# Allegro board fmc_tlu_v1_19.brd
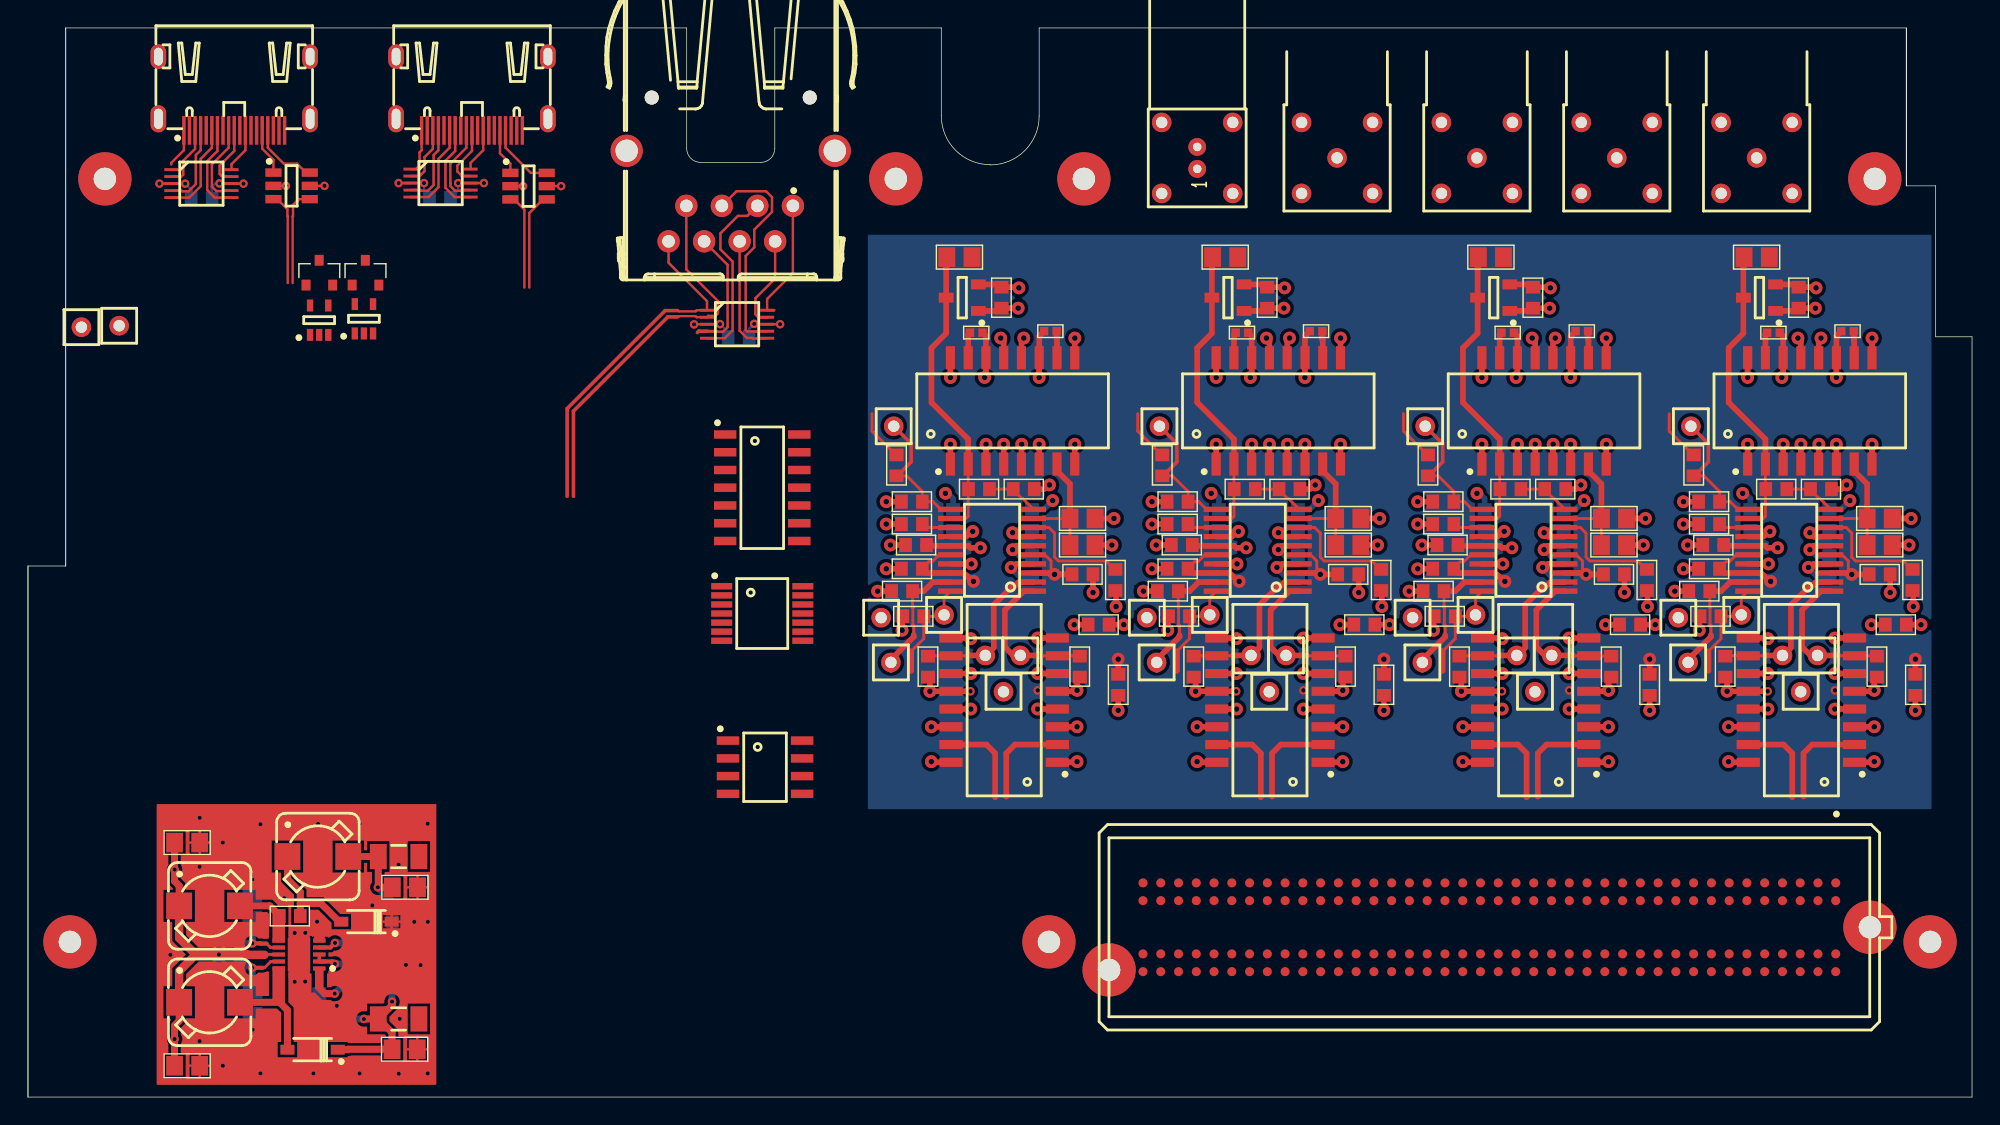
[diagram p0: board, top side]
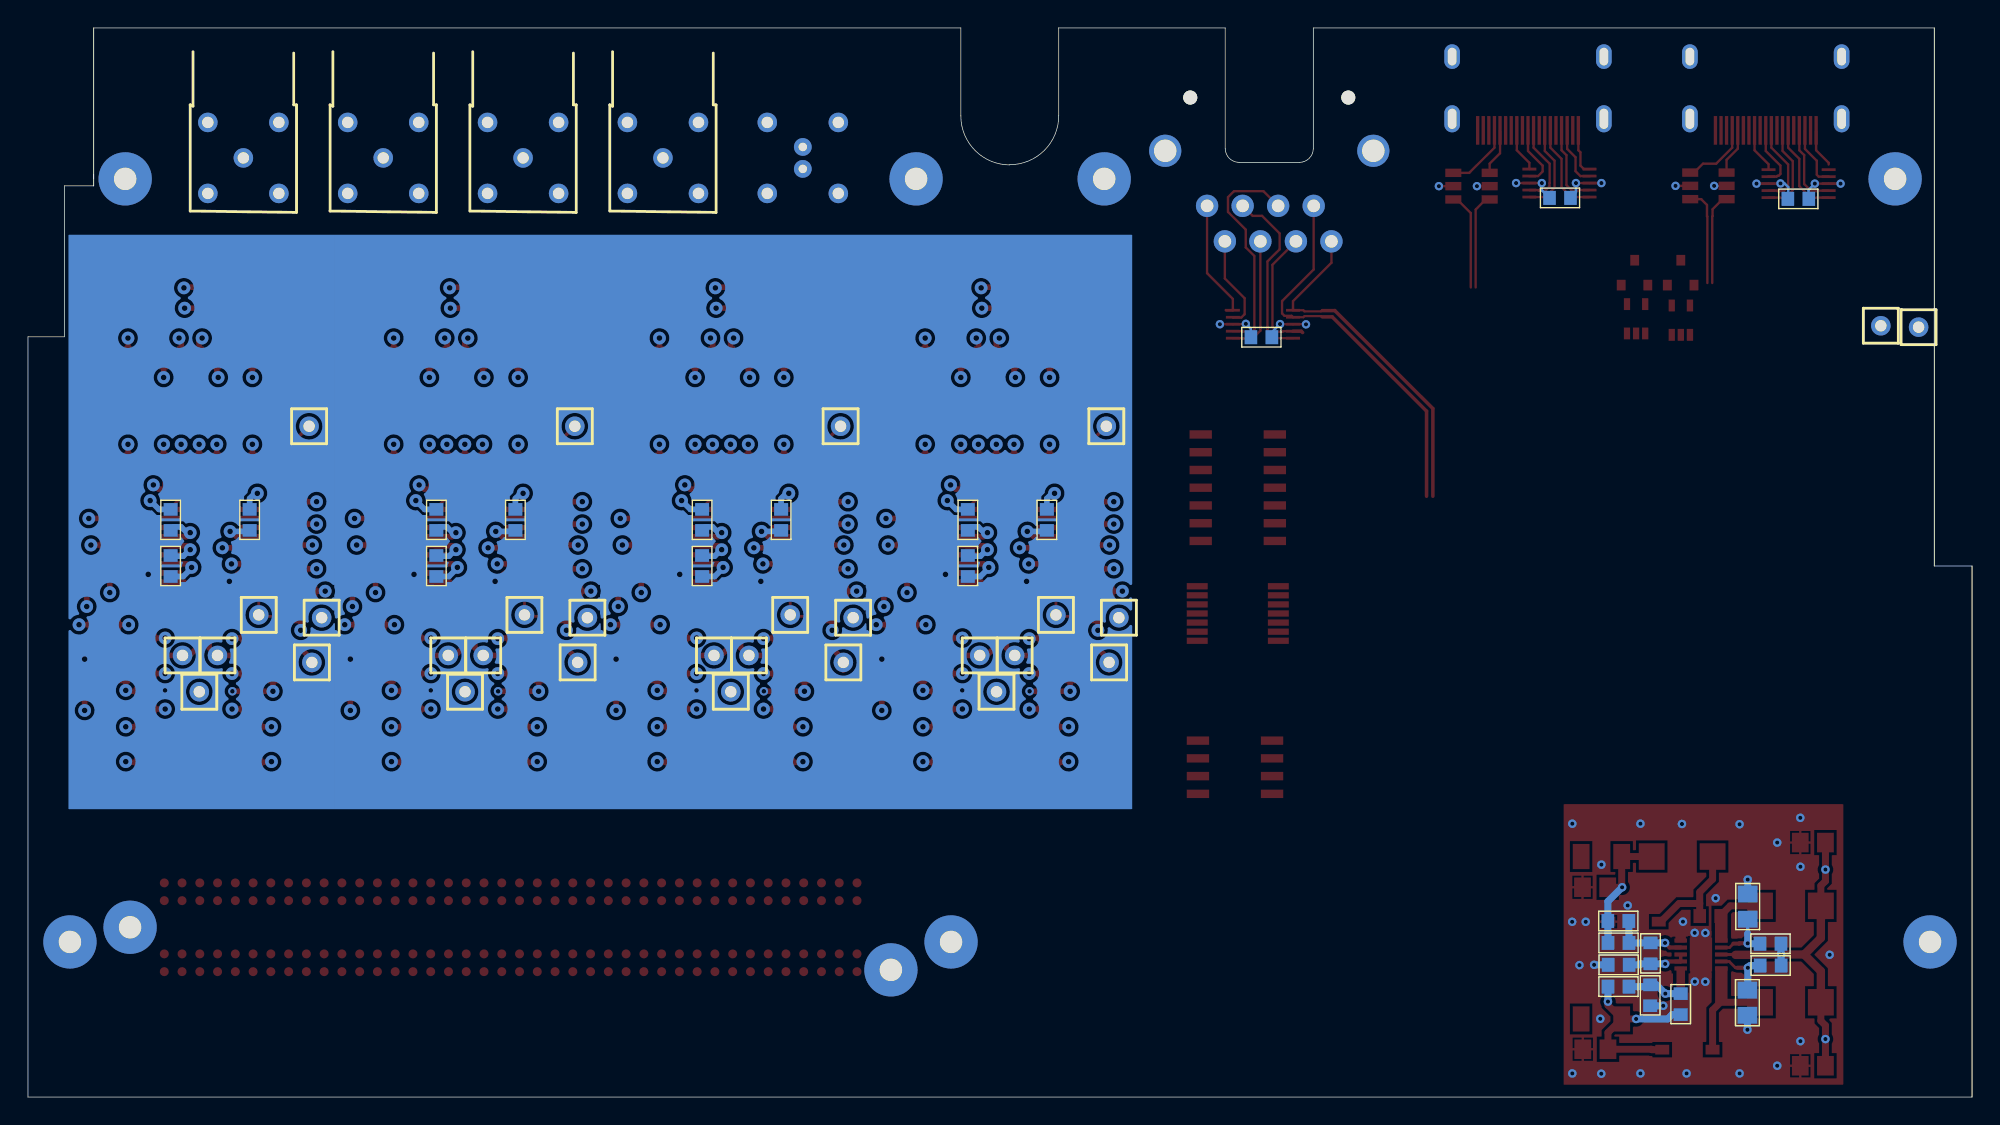
[diagram p1: board, bottom side, seen from below]

Outline 139 x 76.5 mm; copper layers: TOP, L2, L3, L4, L5, BOTTOM. Coordinates in mm from the lower left corner of the outline.
Outline path: 0,38 0,0 ; 0,38 2.7,38 ; 0,38 0,0 ; 0,0 139,0 139,54.4 136.4,54.4 136.4,65.2 134.3,65.2 ; 2.7,38 2.7,76.5 ; 2.7,38 2.7,76.5 ; 2.7,76.5 47.1,76.5 47.1,67.88 arc(47.39,67.17) 48.1,66.88 52.4,66.88 arc(53.1,67.17) 53.4,67.88 53.4,76.5 65.3,76.5 65.3,70.21 arc(66.33,67.74) 68.81,66.72 ; 134.3,76.5 72.3,76.5 72.3,70.2 arc(71.27,67.73) 68.8,66.7 ; 134.3,76.5 134.3,65.7 ; 134.3,76.5 134.3,65.2 ; 134.3,65.2 134.3,66

## Design rules (mm)
constraint set DEFAULT: min track width 0.17, pair gap 0.18
net group BEAM_TRIGGER: nets BEAM_TRIGGER<0> BEAM_TRIGGER<1> BEAM_TRIGGER<2> BEAM_TRIGGER<3>
net group BEAM_TRIGGER*: nets BEAM_TRIGGER*<0> BEAM_TRIGGER*<1> BEAM_TRIGGER*<2> BEAM_TRIGGER*<3>
net group BEAM_TRIGGER_CFD: nets BEAM_TRIGGER_CFD<0> BEAM_TRIGGER_CFD<1> BEAM_TRIGGER_CFD<2> BEAM_TRIGGER_CFD<3>
net group BEAM_TRIGGER_CFD*: nets BEAM_TRIGGER_CFD*<0> BEAM_TRIGGER_CFD*<1> BEAM_TRIGGER_CFD*<2> BEAM_TRIGGER_CFD*<3>
net group FMC_LA: nets FMC_LA<0> FMC_LA<1> FMC_LA<2> FMC_LA<3> FMC_LA<4> FMC_LA<5> FMC_LA<6> FMC_LA<7> FMC_LA<8> FMC_LA<9> FMC_LA<10> FMC_LA<11> FMC_LA<12> FMC_LA<13> FMC_LA<14> FMC_LA<15> FMC_LA<16> FMC_LA<17> FMC_LA<18> FMC_LA<19> FMC_LA<20> FMC_LA<21> FMC_LA<22> FMC_LA<23> FMC_LA<24> FMC_LA<25> FMC_LA<26> FMC_LA<27> FMC_LA<28> FMC_LA<29> FMC_LA<30> FMC_LA<31> FMC_LA<32> FMC_LA<33>
net group FMC_LA*: nets FMC_LA*<0> FMC_LA*<1> FMC_LA*<2> FMC_LA*<3> FMC_LA*<4> FMC_LA*<5> FMC_LA*<6> FMC_LA*<7> FMC_LA*<8> FMC_LA*<9> FMC_LA*<10> FMC_LA*<11> FMC_LA*<12> FMC_LA*<13> FMC_LA*<14> FMC_LA*<15> FMC_LA*<16> FMC_LA*<17> FMC_LA*<18> FMC_LA*<19> FMC_LA*<20> FMC_LA*<21> FMC_LA*<22> FMC_LA*<23> FMC_LA*<24> FMC_LA*<25> FMC_LA*<26> FMC_LA*<27> FMC_LA*<28> FMC_LA*<29> FMC_LA*<30> FMC_LA*<31> FMC_LA*<32> FMC_LA*<33>
net group IN: nets IN<0> IN<1> IN<2> IN<3>
net group VTHRESH: nets VTHRESH<0> VTHRESH<1> VTHRESH<2> VTHRESH<3>

## Placement (name value [footprint] x y rotation side)
C1_1  100nF  [C0603]  69.6 57.2 90 top
C1_2  100nF  [C0603]  88.6 57.2 90 top
C1_3  100nF  [C0603]  107.6 57.2 90 top
C1_4  100nF  [C0603]  126.6 57.2 90 top
C1_5  4.7uF  [C0805]  11.38 18.21 180 top
C2_1  10nF  [C0603]  63.2 42.6 0 top
C2_2  10nF  [C0603]  82.2 42.6 0 top
C2_3  10nF  [C0603]  101.2 42.6 0 top
C2_4  10nF  [C0603]  120.2 42.6 0 top
C2_5  330nF  [C0805]  16.06 6.75 90 bottom
C3_1  1.0uF  [C0603]  77.95 29.5 90 top
C3_2  1.0uF  [C0603]  96.95 29.5 90 top
C3_3  1.0uF  [C0603]  115.95 29.5 90 top
C3_4  1.0uF  [C0603]  134.95 29.5 90 top
C3_5  330nF  [C0805]  16.04 13.63 270 bottom
C4_1  1.0uF  [C0603]  76.55 33.8 0 top
C4_2  1.0uF  [C0603]  95.55 33.8 0 top
C4_3  1.0uF  [C0603]  114.55 33.8 0 top
C4_4  1.0uF  [C0603]  133.55 33.8 0 top
C4_5  100nF  [C0603]  25.27 9.46 180 bottom
C5_1  100nF  [C0603]  75.4 37.4 180 top
C5_2  100nF  [C0603]  94.4 37.4 180 top
C5_3  100nF  [C0603]  113.4 37.4 180 top
C5_4  100nF  [C0603]  132.4 37.4 180 top
C5_5  1uF  [C0603]  18.72 12.95 0 top
C6_1  1.0uF  [C0603]  63.5 39.5 0 top
C6_2  1.0uF  [C0603]  82.5 39.5 0 top
C6_3  1.0uF  [C0603]  101.5 39.5 0 top
C6_4  1.0uF  [C0603]  120.5 39.5 0 top
C6_5  33pF  [C0603]  20.83 6.65 90 bottom
C7_1  100nF  [C0603]  71.8 41.3 270 bottom
C7_2  100nF  [C0603]  90.8 41.3 270 bottom
C7_3  100nF  [C0603]  109.8 41.3 270 bottom
C7_4  100nF  [C0603]  128.8 41.3 270 bottom
C7_5  10uF  [C0805]  26.95 15.01 180 top
C8_1  100nF  [C0603]  63.2 37.8 0 top
C8_2  100nF  [C0603]  82.2 37.8 0 top
C8_3  100nF  [C0603]  101.2 37.8 0 top
C8_4  100nF  [C0603]  120.2 37.8 0 top
C8_5  4.7uF  [C0805]  26.93 3.42 180 top
C9_1  100nF  [C0603]  71.8 38 90 bottom
C9_2  100nF  [C0603]  90.8 38 90 bottom
C9_3  100nF  [C0603]  109.8 38 90 bottom
C9_4  100nF  [C0603]  128.8 38 90 bottom
C9_5  68pF  [C0603]  25.29 12.6 180 bottom
C10_1  100nF  [C0603]  66.15 41.3 270 bottom
C10_2  100nF  [C0603]  85.15 41.3 270 bottom
C10_3  100nF  [C0603]  104.15 41.3 270 bottom
C10_4  100nF  [C0603]  123.15 41.3 270 bottom
C14  100nF  [C0603]  12.42 64.27 0 bottom
C14_5  4.7uF  [C0805]  11.38 2.24 180 top
C15  100nF  [C0603]  50.81 54.37 0 bottom
C16  100nF  [C0603]  29.46 64.34 0 bottom
D1_1  -  [SOT95P240X130-3N]  66.8 57.2 180 top
D1_2  -  [SOT95P240X130-3N]  85.8 57.2 180 top
D1_3  -  [SOT95P240X130-3N]  104.8 57.2 180 top
D1_4  -  [SOT95P240X130-3N]  123.8 57.2 180 top
D1_5  -  [SOD3715X145N]  20.35 3.39 180 top
D2_5  -  [SOD3715X145N]  24.2 12.55 180 top
IC1  -  [SOP65P640X120-14N]  52.5 34.6 0 top
IC1_1  -  [SOIC127P835X237-16N]  70.4 49.1 90 top
IC1_2  -  [SOIC127P835X237-16N]  89.4 49.1 90 top
IC1_3  -  [SOIC127P835X237-16N]  108.4 49.1 90 top
IC1_4  -  [SOIC127P835X237-16N]  127.4 49.1 90 top
IC1_5  -  [SON50P300X300X100-11N-R240X160]  19.38 10.2 180 top
IC2  -  [SOIC127P600X175-14N]  52.5 43.6 0 top
IC2_1  -  [TSSOP20MA_065]  71.9 36.2 90 top
IC2_2  -  [TSSOP20MA_065]  90.9 36.2 90 top
IC2_3  -  [TSSOP20MA_065]  109.9 36.2 90 top
IC2_4  -  [TSSOP20MA_065]  128.9 36.2 90 top
IC3  -  [SOT95P280X145-6N]  18.85 65.2 0 top
IC3_1  -  [SOIC127P835X237-16N]  69.8 28.4 180 top
IC3_2  -  [SOIC127P835X237-16N]  88.8 28.4 180 top
IC3_3  -  [SOIC127P835X237-16N]  107.8 28.4 180 top
IC3_4  -  [SOIC127P835X237-16N]  126.8 28.4 180 top
IC4  -  [SOT65P210X110-5N]  20.82 55.59 90 top
IC5  -  [SOT95P280X145-6N]  35.79 65.18 0 top
IC6  -  [SOT65P210X110-5N]  24.02 55.69 90 top
IC7  -  [SOIC127P600X175-8N]  52.7 23.6 0 top
J1  -  [SAMTEC_MHDMI-19]  14.75 69.17 0 top
J2  -  [SAMTEC_MHDMI-19]  31.75 69.17 0 top
J3  -  [MOLEX_44661-1011]  50.25 68.86 270 top
J4  -  [SAMTEC_ASP-134606-01]  104.49 12.15 0 top
L1_5  10uH  [IND_WURTH_XS]  12.99 6.78 0 top
L2_5  10uH  [IND_WURTH_XS]  12.99 13.68 0 top
L3_5  10uH  [IND_WURTH_XS]  20.73 17.21 0 top
L4_5  -  [INDC3216X130N]  26.5 5.59 0 top
L5_5  -  [INDC3216X130N]  26.5 17.21 0 top
NOREF  -  [unnamed]  3 11.1 0 top
NOREF#2  -  [unnamed]  62.05 65.7 0 top
NOREF#3  -  [unnamed]  5.5 65.7 0 top
NOREF#4  -  [unnamed]  131.7 12.15 0 top
NOREF#5  -  [unnamed]  136 11.1 0 top
NOREF#6  -  [unnamed]  75.5 65.7 0 top
NOREF#7  -  [unnamed]  132.05 65.7 0 top
NOREF#8  -  [unnamed]  73 11.1 0 top
NOREF#9  -  [unnamed]  77.3 9.1 0 top
PX1  -  [LEMOEPG00_302]  83.6 66.56 90 top
PX2  -  [PLEMO80]  93.6 67.2 90 top
PX3  -  [PLEMO80]  103.6 67.2 90 top
PX4  -  [PLEMO80]  113.6 67.2 90 top
PX5  -  [PLEMO80]  123.6 67.2 90 top
R1_1  51  [C0402]  67.8 54.7 180 top
R1_2  51  [C0402]  86.8 54.7 180 top
R1_3  51  [C0402]  105.8 54.7 180 top
R1_4  51  [C0402]  124.8 54.7 180 top
R1_5  4.7k  [C0603]  14.41 10.97 0 bottom
R2_1  12  [C0805]  66.6 60.1 180 top
R2_2  12  [C0805]  85.6 60.1 180 top
R2_3  12  [C0805]  104.6 60.1 180 top
R2_4  12  [C0805]  123.6 60.1 180 top
R2_5  4.7k  [C0603]  14.4 9.41 0 bottom
R3_1  51  [C0603]  68 43.5 0 top
R3_2  51  [C0603]  87 43.5 0 top
R3_3  51  [C0603]  106 43.5 0 top
R3_4  51  [C0603]  125 43.5 0 top
R3_5  20k  [C0603]  22.99 10.28 270 bottom
R4_1  51  [C0402]  73.1 54.8 0 top
R4_2  51  [C0402]  92.1 54.8 0 top
R4_3  51  [C0402]  111.1 54.8 0 top
R4_4  51  [C0402]  130.1 54.8 0 top
R4_5  110k  [C0603]  25.28 11.03 180 bottom
R5_1  100  [C0603]  62.1 45.2 270 top
R5_2  100  [C0603]  81.1 45.2 270 top
R5_3  100  [C0603]  100.1 45.2 270 top
R5_4  100  [C0603]  119.1 45.2 270 top
R5_5  90k9  [C0603]  25.28 7.9 180 bottom
R6_1  100  [C0805]  75.4 41.4 180 top
R6_2  100  [C0805]  94.4 41.4 180 top
R6_3  100  [C0805]  113.4 41.4 180 top
R6_4  100  [C0805]  132.4 41.4 180 top
R6_5  20k  [C0603]  23.01 7.28 90 bottom
R7_1  100  [C0603]  71.2 43.5 180 top
R7_2  100  [C0603]  90.2 43.5 180 top
R7_3  100  [C0603]  109.2 43.5 180 top
R7_4  100  [C0603]  128.2 43.5 180 top
R8_1  100  [C0805]  75.4 39.5 180 top
R8_2  100  [C0805]  94.4 39.5 180 top
R8_3  100  [C0805]  113.4 39.5 180 top
R8_4  100  [C0805]  132.4 39.5 180 top
R9_1  33k  [C0603]  63.2 41 0 top
R9_2  33k  [C0603]  82.2 41 0 top
R9_3  33k  [C0603]  101.2 41 0 top
R9_4  33k  [C0603]  120.2 41 0 top
R10_1  XX  [C0603]  77.75 37 90 top
R10_2  XX  [C0603]  96.75 37 90 top
R10_3  XX  [C0603]  115.75 37 90 top
R10_4  XX  [C0603]  134.75 37 90 top
R11_1  75  [C0603]  62.5 36.2 0 top
R11_2  75  [C0603]  81.5 36.2 0 top
R11_3  75  [C0603]  100.5 36.2 0 top
R11_4  75  [C0603]  119.5 36.2 0 top
R12_1  75  [C0603]  64.35 30.8 90 top
R12_2  75  [C0603]  83.35 30.8 90 top
R12_3  75  [C0603]  102.35 30.8 90 top
R12_4  75  [C0603]  121.35 30.8 90 top
R13_1  75  [C0603]  63.3 34.4 0 top
R13_2  75  [C0603]  82.3 34.4 0 top
R13_3  75  [C0603]  101.3 34.4 0 top
R13_4  75  [C0603]  120.3 34.4 0 top
R14_1  75  [C0603]  75.2 30.8 90 top
R14_2  75  [C0603]  94.2 30.8 90 top
R14_3  75  [C0603]  113.2 30.8 90 top
R14_4  75  [C0603]  132.2 30.8 90 top
T1  -  [SOT23]  20.82 58.99 90 top
T2  -  [SOT23]  24.12 58.99 90 top
TP1_1  -  [TP_HOLE_08]  61.9 48 0 top
TP1_2  -  [TP_HOLE_08]  80.9 48 0 top
TP1_3  -  [TP_HOLE_08]  99.9 48 0 top
TP1_4  -  [TP_HOLE_08]  118.9 48 0 top
TP2_1  -  [TP_HOLE_08]  65.5 34.5 0 top
TP2_2  -  [TP_HOLE_08]  84.5 34.5 0 top
TP2_3  -  [TP_HOLE_08]  103.5 34.5 0 top
TP2_4  -  [TP_HOLE_08]  122.5 34.5 0 top
TP3_1  -  [TP_HOLE_08]  61.7 31.1 0 top
TP3_2  -  [TP_HOLE_08]  80.7 31.1 0 top
TP3_3  -  [TP_HOLE_08]  99.7 31.1 0 top
TP3_4  -  [TP_HOLE_08]  118.7 31.1 0 top
TP4_1  -  [TP_HOLE_08]  61 34.3 0 top
TP4_2  -  [TP_HOLE_08]  80 34.3 0 top
TP4_3  -  [TP_HOLE_08]  99 34.3 0 top
TP4_4  -  [TP_HOLE_08]  118 34.3 0 top
TP5_1  -  [TP_HOLE_08]  70.95 31.6 0 top
TP5_2  -  [TP_HOLE_08]  89.95 31.6 0 top
TP5_3  -  [TP_HOLE_08]  108.95 31.6 0 top
TP5_4  -  [TP_HOLE_08]  127.95 31.6 0 top
TP6_1  -  [TP_HOLE_08]  68.45 31.6 0 top
TP6_2  -  [TP_HOLE_08]  87.45 31.6 0 top
TP6_3  -  [TP_HOLE_08]  106.45 31.6 0 top
TP6_4  -  [TP_HOLE_08]  125.45 31.6 0 top
TP7_1  -  [TP_HOLE_08]  69.75 29 0 top
TP7_2  -  [TP_HOLE_08]  88.75 29 0 top
TP7_3  -  [TP_HOLE_08]  107.75 29 0 top
TP7_4  -  [TP_HOLE_08]  126.75 29 0 top
TP11  -  [TP_HOLE_08]  6.52 55.19 0 top
TP12  -  [TP_HOLE_08]  3.82 55.09 0 top
U1  -  [SOT552-1]  12.4 65.36 0 top
U2  -  [SOT552-1]  50.7 55.3 0 top
U3  -  [SOT552-1]  29.5 65.4 0 top

## Library data of the parts
C1_1-C1_4 C4_5 C5_1-C5_4 C7_1-C7_4 C8_1-C8_4 C9_1-C9_4 C10_1-C10_4 C14-C16 = CAPCERSMDCL2: part number: CAPCERSMDCL2_0603-100NF,16V; tolerance: 10%
C1_5 C8_5 C14_5 = CAPCERSMDCL2: part number: CAPCERSMDCL2_0805-4.7UF,10V; tolerance: +80%-20%
C2_1-C2_4 = CAPCERSMDCL2: part number: CAPCERSMDCL2_0603-10NF,50V; tolerance: 10%
C2_5 C3_5 = CAPCERSMDCL2: part number: CAPCERSMDCL2_0805-330NF,50V; tolerance: 10%
C3_1-C3_4 C4_1-C4_4 C6_1-C6_4 = CAPCERSMDCL2: part number: CAPCERSMDCL2_0603-1.0UF,6.3V; tolerance: 10%
C5_5 = CAPCERSMDCL2: part number: CAPCERSMDCL2_0603-1UF,16V; tolerance: 10%
C6_5 = CAPCERSMDCL1: part number: CAPCERSMDCL1_0603-33PF,50V; tolerance: 5%
C7_5 = CAPCERSMDCL2: part number: CAPCERSMDCL2_0805-10UF,10V_GEN; tolerance: 10%
C9_5 = CAPCERSMDCL1: part number: CAPCERSMDCL1_0603-68PF,50V; tolerance: 5%
D1_1-D1_4 = DIODE_DUAL_SERIES: part number: HBAT-540C
D1_5 D2_5 = DIODE: part number: DIODE_SCHOTTKY_CA-SD101AW
IC1 = AD5665R: part number: AD5665RBRUZ-1
IC1_1-IC1_4 = DELAY_LINE_GL2L: part number: GL2L5LS050D-C
IC1_5 = LT3471: part number: LT3471EDD#PBF
IC2 = OPA4277: part number: OPA4277UA
IC2_1-IC2_4 = MAX9601
IC3 IC5 = USBLC6-2: part number: USBLC6-2SC6
IC3_1-IC3_4 = DELAY_LINE_GL2L: part number: GL2L5LS100D-C
IC4 IC6 = 74LVC1G07: part number: SN74LVC1G07DCK
IC7 = 24AA025E48
J1 J2 = CON19P: part number: MHDMI-19-02-H-TH-L-TR
J3 = CON8P: part number: CON8P-MOLEX_44661-1011
J4 = CON160P_40CDGH: part number: ASP-134606-01
L1_5 L2_5 L3_5 = INDUCTANCE: part number: INDUCTANCE_XS-10UH_25%
L4_5 L5_5 = FERRITE: part number: FERRITE_SMD-7427921,WURTH
PX1 = PLEMO2CI: part number: PLEMO2CI-PLEMO2-00B
PX2-PX5 = PCOAX: part number: PCOAX-PLEMO00C
R1_1-R1_4 R4_1-R4_4 = RSMD0402: part number: RSMD0402_1/16W-51,1%; tolerance: 1%
R1_5 R2_5 = RSMD0603: part number: RSMD0603_1/16W-4K7,5%; tolerance: 5%
R2_1-R2_4 = RSMD0805: part number: RSMD0805_125MW-12,1%; tolerance: 1%
R3_1-R3_4 = RSMD0603: part number: RSMD0603_1/10W-51,1%; tolerance: 1%
R3_5 R6_5 = RSMD0603: part number: RSMD0603_1/16W-20K,1%; tolerance: 1%
R4_5 = RSMD0603: part number: RSMD0603_100MW-110K,0.1%; tolerance: 0.1%
R5_1-R5_4 R7_1-R7_4 = RSMD0603: part number: RSMD0603_1/10W-100,1%; tolerance: 1%
R5_5 = RSMD0603: part number: RSMD0603_1/16W-90K9,1%; tolerance: 1%
R6_1-R6_4 R8_1-R8_4 = RSMD0805: part number: RSMD0805_125MW-100,1%; tolerance: 1%
R9_1-R9_4 = RSMD0603: part number: RSMD0603_1/10W-33K,1%; tolerance: 1%
R10_1-R10_4 = RSMD0603: part number: RSMD0603_1/10W-XX,1%; tolerance: 1%
R11_1-R11_4 R12_1-R12_4 R13_1-R13_4 R14_1-R14_4 = RSMD0603: part number: RSMD0603_1/10W-75,1%; tolerance: 1%
T1 T2 = TRANS MOSFET: part number: TRANS MOSFET_GSD-FDV301N,SOT23
TP1_1-TP1_4 TP2_1-TP2_4 TP3_1-TP3_4 TP4_1-TP4_4 TP5_1-TP5_4 TP6_1-TP6_4 TP7_1-TP7_4 TP11 TP12 = TP: part number: TP_HOLE-0.8MM
U1-U3 = PRTR5V0U8S: part number: PRTR5V0U8S_TSSOP-NXP

## Footprints (pads in the part's own frame, mm; a bottom-side part is the same pattern mirrored in y, then rotated)
C0402
  rect 0.6x0.6 smd: 1(-0.45,0) 2(0.45,0)
C0603
  rect 0.9x1 smd: 1(-0.75,0) 2(0.75,0)
C0805
  rect 1.2x1.4 smd: 1(-0.9,0) 2(0.9,0)
IND_WURTH_XS
  rect 1.85x1.9 smd: 1(-2.18,0) 2(2.17,0)
INDC3216X130N
  rect 1.2x1.8 smd: 1(-1.45,0) 2(1.45,0)
LEMOEPG00_302
  round 1.27 hole 0.6: 1(-0.15,0) 2(1.42,0)
  round 1.397 hole 0.813: 3(-1.905,-2.54) 4(3.175,-2.54) 5(3.175,2.54) 6(-1.905,2.54)
MOLEX_44661-1011
  round 1 hole 3.25 unplated: (-2.66,5.65) (-2.66,-5.65)
  round 1.6 hole 0.9: 1(5.09,4.445) 2(7.63,3.175) 3(5.09,1.905) 4(7.63,0.635) 5(5.09,-0.635) 6(7.63,-1.905) 7(5.09,-3.175) 8(7.63,-4.445)
  round 2.301 hole 1.6: 9(1.15,7.44) 10(1.15,-7.44)
PLEMO80
  round 1.397 hole 0.813: 1(0,0) 2(2.54,-2.54) 3(2.54,2.54) 4(-2.54,2.54) 5(-2.54,-2.54)
SAMTEC_ASP-134606-01
  round 1.001 hole 1.3 unplated: (-27.19,-3.05) (27.19,0)
  round 0.64 smd: C1(24.765,3.175) C2(23.495,3.175) C3(22.225,3.175) C4(20.955,3.175) C5(19.685,3.175) C6(18.415,3.175) C7(17.145,3.175) C8(15.875,3.175) C9(14.605,3.175) C10(13.335,3.175) C11(12.065,3.175) C12(10.795,3.175) C13(9.525,3.175) C14(8.255,3.175) C15(6.985,3.175) C16(5.715,3.175) C17(4.445,3.175) C18(3.175,3.175) C19(1.905,3.175) C20(0.635,3.175) C21(-0.635,3.175) C22(-1.905,3.175) C23(-3.175,3.175) C24(-4.445,3.175) C25(-5.715,3.175) C26(-6.985,3.175) C27(-8.255,3.175) C28(-9.525,3.175) C29(-10.795,3.175) C30(-12.065,3.175) C31(-13.335,3.175) C32(-14.605,3.175) C33(-15.875,3.175) C34(-17.145,3.175) C35(-18.415,3.175) C36(-19.685,3.175) C37(-20.955,3.175) C38(-22.225,3.175) C39(-23.495,3.175) C40(-24.765,3.175) D1(24.765,1.905) D2(23.495,1.905) D3(22.225,1.905) D4(20.955,1.905) D5(19.685,1.905) D6(18.415,1.905) D7(17.145,1.905) D8(15.875,1.905) D9(14.605,1.905) D10(13.335,1.905) D11(12.065,1.905) D12(10.795,1.905) D13(9.525,1.905) D14(8.255,1.905) D15(6.985,1.905) D16(5.715,1.905) D17(4.445,1.905) D18(3.175,1.905) D19(1.905,1.905) D20(0.635,1.905) D21(-0.635,1.905) D22(-1.905,1.905) D23(-3.175,1.905) D24(-4.445,1.905) D25(-5.715,1.905) D26(-6.985,1.905) D27(-8.255,1.905) D28(-9.525,1.905) D29(-10.795,1.905) D30(-12.065,1.905) D31(-13.335,1.905) D32(-14.605,1.905) D33(-15.875,1.905) D34(-17.145,1.905) D35(-18.415,1.905) D36(-19.685,1.905) D37(-20.955,1.905) D38(-22.225,1.905) D39(-23.495,1.905) D40(-24.765,1.905) G1(24.765,-1.905) G2(23.495,-1.905) G3(22.225,-1.905) G4(20.955,-1.905) G5(19.685,-1.905) G6(18.415,-1.905) G7(17.145,-1.905) G8(15.875,-1.905) G9(14.605,-1.905) G10(13.335,-1.905) G11(12.065,-1.905) G12(10.795,-1.905) G13(9.525,-1.905) G14(8.255,-1.905) G15(6.985,-1.905) G16(5.715,-1.905) G17(4.445,-1.905) G18(3.175,-1.905) G19(1.905,-1.905) G20(0.635,-1.905) G21(-0.635,-1.905) G22(-1.905,-1.905) G23(-3.175,-1.905) G24(-4.445,-1.905) G25(-5.715,-1.905) G26(-6.985,-1.905) G27(-8.255,-1.905) G28(-9.525,-1.905) G29(-10.795,-1.905) G30(-12.065,-1.905) G31(-13.335,-1.905) G32(-14.605,-1.905) G33(-15.875,-1.905) G34(-17.145,-1.905) G35(-18.415,-1.905) G36(-19.685,-1.905) G37(-20.955,-1.905) G38(-22.225,-1.905) G39(-23.495,-1.905) G40(-24.765,-1.905) H1(24.765,-3.175) H2(23.495,-3.175) H3(22.225,-3.175) H4(20.955,-3.175) H5(19.685,-3.175) H6(18.415,-3.175) H7(17.145,-3.175) H8(15.875,-3.175) H9(14.605,-3.175) H10(13.335,-3.175) H11(12.065,-3.175) H12(10.795,-3.175) H13(9.525,-3.175) H14(8.255,-3.175) H15(6.985,-3.175) H16(5.715,-3.175) H17(4.445,-3.175) H18(3.175,-3.175) H19(1.905,-3.175) H20(0.635,-3.175) H21(-0.635,-3.175) H22(-1.905,-3.175) H23(-3.175,-3.175) H24(-4.445,-3.175) H25(-5.715,-3.175) H26(-6.985,-3.175) H27(-8.255,-3.175) H28(-9.525,-3.175) H29(-10.795,-3.175) H30(-12.065,-3.175) H31(-13.335,-3.175) H32(-14.605,-3.175) H33(-15.875,-3.175) H34(-17.145,-3.175) H35(-18.415,-3.175) H36(-19.685,-3.175) H37(-20.955,-3.175) H38(-22.225,-3.175) H39(-23.495,-3.175) H40(-24.765,-3.175)
SAMTEC_MHDMI-19
  rect 0.24x2.05 smd: 1(-3.6,0) 2(-3.2,0) 3(-2.8,0) 4(-2.4,0) 5(-2,0) 6(-1.6,0) 7(-1.2,0) 8(-0.8,0) 9(-0.4,0) 10(0,0) 11(0.4,0) 12(0.8,0) 13(1.2,0) 14(1.6,0) 15(2,0) 16(2.4,0) 17(2.8,0) 18(3.2,0) 19(3.6,0)
  oval 1.12x1.94 hole 0.62x1.44: 20(-5.425,0.83) 21(5.425,0.83)
  oval 1.12x1.76 hole 0.62x1.26: 22(-5.425,5.28) 23(5.425,5.28)
SOD3715X145N
  rect 1x0.7 smd: A(1.8,0) C(-1.8,0)
SOIC127P600X175-8N
  rect 1.6x0.6 smd: 1(-2.65,1.905) 2(-2.65,0.635) 3(-2.65,-0.635) 4(-2.65,-1.905) 5(2.65,-1.905) 6(2.65,-0.635) 7(2.65,0.635) 8(2.65,1.905)
SOIC127P600X175-14N
  rect 1.6x0.6 smd: 1(-2.65,3.81) 2(-2.65,2.54) 3(-2.65,1.27) 4(-2.65,0) 5(-2.65,-1.27) 6(-2.65,-2.54) 7(-2.65,-3.81) 8(2.65,-3.81) 9(2.65,-2.54) 10(2.65,-1.27) 11(2.65,0) 12(2.65,1.27) 13(2.65,2.54) 14(2.65,3.81)
SOIC127P835X237-16N
  rect 1.65x0.65 smd: 1(-3.8,4.445) 2(-3.8,3.175) 3(-3.8,1.905) 4(-3.8,0.635) 5(-3.8,-0.635) 6(-3.8,-1.905) 7(-3.8,-3.175) 8(-3.8,-4.445) 9(3.8,-4.445) 10(3.8,-3.175) 11(3.8,-1.905) 12(3.8,-0.635) 13(3.8,0.635) 14(3.8,1.905) 15(3.8,3.175) 16(3.8,4.445)
SON50P300X300X100-11N-R240X160
  rect 0.9x0.3 smd: 1(-1.45,1) 2(-1.45,0.5) 3(-1.45,0) 4(-1.45,-0.5) 5(-1.45,-1) 6(1.45,-1) 7(1.45,-0.5) 8(1.45,0) 9(1.45,0.5) 10(1.45,1)
  rect 1.6x2.4 smd: 11(0,0)
SOP65P640X120-14N
  rect 1.5x0.45 smd: 1(-2.9,1.95) 2(-2.9,1.3) 3(-2.9,0.65) 4(-2.9,0) 5(-2.9,-0.65) 6(-2.9,-1.3) 7(-2.9,-1.95) 8(2.9,-1.95) 9(2.9,-1.3) 10(2.9,-0.65) 11(2.9,0) 12(2.9,0.65) 13(2.9,1.3) 14(2.9,1.95)
SOT23
  rect 0.762x0.635 smd: 1(-0.889,0.94) 2(-0.889,-0.965) 3(0.889,0)
SOT65P210X110-5N
  rect 0.85x0.45 smd: 1(-1.05,0.65) 2(-1.05,0) 3(-1.05,-0.65) 4(1.05,-0.65) 5(1.05,0.65)
SOT95P240X130-3N
  rect 1.05x0.7 smd: 1(-1.15,0.95) 2(-1.15,-0.95) 3(1.15,0)
SOT95P280X145-6N
  rect 1.15x0.6 smd: 1(-1.3,0.95) 2(-1.3,0) 3(-1.3,-0.95) 4(1.3,-0.95) 5(1.3,0) 6(1.3,0.95)
SOT552-1
  rect 1x0.2 smd: 1(-2.15,1) 2(-2.15,0.5) 3(-2.15,0) 4(-2.15,-0.5) 5(-2.15,-1) 6(2.15,-1) 7(2.15,-0.5) 8(2.15,0) 9(2.15,0.5) 10(2.15,1)
TP_HOLE_08
  round 1.397 hole 0.813: 1(0,0)
TSSOP20MA_065
  rect 0.381x1.778 smd: 1(0,0) 2(0.65,0) 3(1.3,0) 4(1.95,0) 5(2.6,0) 6(3.25,0) 7(3.9,0) 8(4.55,0) 9(5.2,0) 10(5.85,0) 11(5.85,5.94) 12(5.2,5.94) 13(4.55,5.94) 14(3.9,5.94) 15(3.25,5.94) 16(2.6,5.94) 17(1.95,5.94) 18(1.3,5.94) 19(0.65,5.94) 20(0,5.94)
unnamed
  round 3.81 hole 1.6: (0,0)

## Nets
GND_HDMI1: J1.20 J1.21 J1.22 J1.23
GND_HDMI2: J2.20 J2.21 J2.22 J2.23
GND_SIGNAL: C1_5.1(A<0>) C2_1.1(A<0>) C2_2.1(A<0>) C2_3.1(A<0>) C2_4.1(A<0>) C2_5.1(A<0>) C3_1.1(A<0>) C3_2.1(A<0>) C3_3.1(A<0>) C3_4.1(A<0>) C3_5.1(A<0>) C4_1.1(A<0>) C4_2.1(A<0>) C4_3.1(A<0>) C4_4.1(A<0>) C4_5.1(A<0>) C5_1.1(A<0>) C5_2.1(A<0>) C5_3.1(A<0>) C5_4.1(A<0>) C6_1.1(A<0>) C6_2.1(A<0>) C6_3.1(A<0>) C6_4.1(A<0>) C7_1.1(A<0>) C7_2.1(A<0>) C7_3.1(A<0>) C7_4.1(A<0>) C7_5.1(A<0>) C8_1.1(A<0>) C8_2.1(A<0>) C8_3.1(A<0>) C8_4.1(A<0>) C8_5.1(A<0>) C9_1.1(A<0>) C9_2.1(A<0>) C9_3.1(A<0>) C9_4.1(A<0>) C10_1.1(A<0>) C10_2.1(A<0>) C10_3.1(A<0>) C10_4.1(A<0>) C14.1(A<0>) C14_5.1(A<0>) C15.1(A<0>) C16.1(A<0>) D2_5.C(K<0>) IC1.1(LDAC*) IC1.2(ADDR1) IC1.8(ADDR2) IC1.12 IC1_1.1(SH<0>) IC1_1.3(SH<1>) IC1_1.4(SH<2>) IC1_1.5(SH<3>) IC1_1.6(SH<4>) IC1_1.8(SH<5>) IC1_1.9(SH<6>) IC1_1.11(SH<7>) IC1_1.12(SH<8>) IC1_1.13(SH<9>) IC1_1.14(SH<10>) IC1_1.16(SH<11>) IC1_2.1(SH<0>) IC1_2.3(SH<1>) IC1_2.4(SH<2>) IC1_2.5(SH<3>) IC1_2.6(SH<4>) IC1_2.8(SH<5>) IC1_2.9(SH<6>) IC1_2.11(SH<7>) IC1_2.12(SH<8>) IC1_2.13(SH<9>) IC1_2.14(SH<10>) IC1_2.16(SH<11>) IC1_3.1(SH<0>) IC1_3.3(SH<1>) IC1_3.4(SH<2>) IC1_3.5(SH<3>) IC1_3.6(SH<4>) IC1_3.8(SH<5>) IC1_3.9(SH<6>) IC1_3.11(SH<7>) IC1_3.12(SH<8>) IC1_3.13(SH<9>) IC1_3.14(SH<10>) IC1_3.16(SH<11>) IC1_4.1(SH<0>) IC1_4.3(SH<1>) IC1_4.4(SH<2>) IC1_4.5(SH<3>) IC1_4.6(SH<4>) IC1_4.8(SH<5>) IC1_4.9(SH<6>) IC1_4.11(SH<7>) IC1_4.12(SH<8>) IC1_4.13(SH<9>) IC1_4.14(SH<10>) IC1_4.16(SH<11>) IC1_5.5(FB2*) IC1_5.11 IC2_1.4(LE<0>) IC2_1.17(LE<0>) IC2_2.4(LE<0>) IC2_2.17(LE<0>) IC2_3.4(LE<0>) IC2_3.17(LE<0>) IC2_4.4(LE<0>) IC2_4.17(LE<0>) IC3.2(GND) IC3_1.1(SH<0>) IC3_1.3(SH<1>) IC3_1.4(SH<2>) IC3_1.5(SH<3>) IC3_1.6(SH<4>) IC3_1.8(SH<5>) IC3_1.9(SH<6>) IC3_1.11(SH<7>) IC3_1.12(SH<8>) IC3_1.13(SH<9>) IC3_1.14(SH<10>) IC3_1.16(SH<11>) IC3_2.1(SH<0>) IC3_2.3(SH<1>) IC3_2.4(SH<2>) IC3_2.5(SH<3>) IC3_2.6(SH<4>) IC3_2.8(SH<5>) IC3_2.9(SH<6>) IC3_2.11(SH<7>) IC3_2.12(SH<8>) IC3_2.13(SH<9>) IC3_2.14(SH<10>) IC3_2.16(SH<11>) IC3_3.1(SH<0>) IC3_3.3(SH<1>) IC3_3.4(SH<2>) IC3_3.5(SH<3>) IC3_3.6(SH<4>) IC3_3.8(SH<5>) IC3_3.9(SH<6>) IC3_3.11(SH<7>) IC3_3.12(SH<8>) IC3_3.13(SH<9>) IC3_3.14(SH<10>) IC3_3.16(SH<11>) IC3_4.1(SH<0>) IC3_4.3(SH<1>) IC3_4.4(SH<2>) IC3_4.5(SH<3>) IC3_4.6(SH<4>) IC3_4.8(SH<5>) IC3_4.9(SH<6>) IC3_4.11(SH<7>) IC3_4.12(SH<8>) IC3_4.13(SH<9>) IC3_4.14(SH<10>) IC3_4.16(SH<11>) IC4.3 IC5.2(GND) IC6.3 IC7.4(VSS) J1.2(A<1>) J1.5(A<4>) J1.8(A<7>) J1.11(A<10>) J1.17(A<16>) J2.2(A<1>) J2.5(A<4>) J2.8(A<7>) J2.11(A<10>) J2.17(A<16>) J4.C1(C<1>) J4.C4(C<4>) J4.C5(C<5>) J4.C8(C<8>) J4.C9(C<9>) J4.C12(C<12>) J4.C13(C<13>) J4.C16(C<16>) J4.C17(C<17>) J4.C20(C<20>) J4.C21(C<21>) J4.C24(C<24>) J4.C25(C<25>) J4.C28(C<28>) J4.C29(C<29>) J4.C32(C<32>) J4.C33(C<33>) J4.C36(C<36>) J4.C38(C<38>) J4.C40(C<40>) J4.D2(D<2>) J4.D3(D<3>) J4.D6(D<6>) J4.D7(D<7>) J4.D10(D<10>) J4.D13(D<13>) J4.D16(D<16>) J4.D19(D<19>) J4.D22(D<22>) J4.D25(D<25>) J4.D28(D<28>) J4.D37(D<37>) J4.D39(D<39>) J4.G1(G<1>) J4.G4(G<4>) J4.G5(G<5>) J4.G8(G<8>) J4.G11(G<11>) J4.G14(G<14>) J4.G17(G<17>) J4.G20(G<20>) J4.G23(G<23>) J4.G26(G<26>) J4.G29(G<29>) J4.G32(G<32>) J4.G35(G<35>) J4.G38(G<38>) J4.G40(G<40>) J4.H3(H<3>) J4.H6(H<6>) J4.H9(H<9>) J4.H12(H<12>) J4.H15(H<15>) J4.H18(H<18>) J4.H21(H<21>) J4.H24(H<24>) J4.H27(H<27>) J4.H30(H<30>) J4.H33(H<33>) J4.H36(H<36>) J4.H39(H<39>) PX1.3 PX1.4 PX1.5 PX1.6 PX2.2 PX2.3 PX2.4 PX2.5 PX3.2 PX3.3 PX3.4 PX3.5 PX4.2 PX4.3 PX4.4 PX4.5 PX5.2 PX5.3 PX5.4 PX5.5 R1_1.1(A<0>) R1_2.1(A<0>) R1_3.1(A<0>) R1_4.1(A<0>) R4_1.1(A<0>) R4_2.1(A<0>) R4_3.1(A<0>) R4_4.1(A<0>) R6_1.1(A<0>) R6_2.1(A<0>) R6_3.1(A<0>) R6_4.1(A<0>) R6_5.1(A<0>) R7_1.1(A<0>) R7_2.1(A<0>) R7_3.1(A<0>) R7_4.1(A<0>) R8_1.1(A<0>) R8_2.1(A<0>) R8_3.1(A<0>) R8_4.1(A<0>) R9_1.1(A<0>) R9_2.1(A<0>) R9_3.1(A<0>) R9_4.1(A<0>) R10_1.1(A<0>) R10_2.1(A<0>) R10_3.1(A<0>) R10_4.1(A<0>) R11_1.1(A<0>) R11_2.1(A<0>) R11_3.1(A<0>) R11_4.1(A<0>) R12_1.1(A<0>) R12_2.1(A<0>) R12_3.1(A<0>) R12_4.1(A<0>) R13_1.1(A<0>) R13_2.1(A<0>) R13_3.1(A<0>) R13_4.1(A<0>) R14_1.1(A<0>) R14_2.1(A<0>) R14_3.1(A<0>) R14_4.1(A<0>) TP4_1.1(A<0>) TP4_2.1(A<0>) TP4_3.1(A<0>) TP4_4.1(A<0>) TP7_1.1(A<0>) TP7_2.1(A<0>) TP7_3.1(A<0>) TP7_4.1(A<0>) U1.3 U2.3 U3.3
P2V5: C3_1.2(B<0>) C3_2.2(B<0>) C3_3.2(B<0>) C3_4.2(B<0>) C5_1.2(B<0>) C5_2.2(B<0>) C5_3.2(B<0>) C5_4.2(B<0>) C8_1.2(B<0>) C8_2.2(B<0>) C8_3.2(B<0>) C8_4.2(B<0>) C14.2(B<0>) C15.2(B<0>) C16.2(B<0>) IC2_1.3(VCCO_<0>) IC2_1.5(LE*<0>) IC2_1.16(LE*<0>) IC2_1.18(VCCO_<1>) IC2_2.3(VCCO_<0>) IC2_2.5(LE*<0>) IC2_2.16(LE*<0>) IC2_2.18(VCCO_<1>) IC2_3.3(VCCO_<0>) IC2_3.5(LE*<0>) IC2_3.16(LE*<0>) IC2_3.18(VCCO_<1>) IC2_4.3(VCCO_<0>) IC2_4.5(LE*<0>) IC2_4.16(LE*<0>) IC2_4.18(VCCO_<1>) IC3.5(VBUS) IC4.5 IC5.5(VBUS) IC6.5 J4.G39(G<39>) J4.H40(H<40>) U1.8 U2.8 U3.8
P3V3: C1_5.2(B<0>) C14_5.2(B<0>) IC1.3 IC1.6(POR) IC1.9(CLR*) IC1_5.8(VIN) IC7.8(VCC) J4.C39(C<39>) J4.D32(D<32>) J4.D36(D<36>) J4.D38(D<38>) J4.D40(D<40>) L1_5.1(A<0>) L2_5.1(A<0>) R1_5.1(A<0>) R2_5.1(A<0>) T1.3(D) T2.3(D)
P5V: C1_1.2(B<0>) C1_2.2(B<0>) C1_3.2(B<0>) C1_4.2(B<0>) C4_1.2(B<0>) C4_2.2(B<0>) C4_3.2(B<0>) C4_4.2(B<0>) C7_1.2(B<0>) C7_2.2(B<0>) C7_3.2(B<0>) C7_4.2(B<0>) C10_1.2(B<0>) C10_2.2(B<0>) C10_3.2(B<0>) C10_4.2(B<0>) D1_1.2(C) D1_2.2(C) D1_3.2(C) D1_4.2(C) IC2.4(V+) IC2_1.7(VCC<0>) IC2_1.14(VCC<1>) IC2_2.7(VCC<0>) IC2_2.14(VCC<1>) IC2_3.7(VCC<0>) IC2_3.14(VCC<1>) IC2_4.7(VCC<0>) IC2_4.14(VCC<1>)
P12V: J4.C35(C<35>) J4.C37(C<37>)
+VOUT_5: L4_5.2(B)
-VOUT_5: L5_5.2(B)
BEAM_TRIGGER*<0>: IC2_4.19(Q*<0>) R11_4.2(B<0>) TP3_4.1(A<0>)
BEAM_TRIGGER*<1>: IC2_3.19(Q*<0>) R11_3.2(B<0>) TP3_3.1(A<0>)
BEAM_TRIGGER*<2>: IC2_2.19(Q*<0>) R11_2.2(B<0>) TP3_2.1(A<0>)
BEAM_TRIGGER*<3>: IC2_1.19(Q*<0>) R11_1.2(B<0>) TP3_1.1(A<0>)
BEAM_TRIGGER<0>: IC2_4.20(Q<0>) R13_4.2(B<0>) TP2_4.1(A<0>)
BEAM_TRIGGER<1>: IC2_3.20(Q<0>) R13_3.2(B<0>) TP2_3.1(A<0>)
BEAM_TRIGGER<2>: IC2_2.20(Q<0>) R13_2.2(B<0>) TP2_2.1(A<0>)
BEAM_TRIGGER<3>: IC2_1.20(Q<0>) R13_1.2(B<0>) TP2_1.1(A<0>)
BEAM_TRIGGER_CFD*<0>: IC3_4.15(A2)
BEAM_TRIGGER_CFD*<1>: IC3_3.15(A2)
BEAM_TRIGGER_CFD*<2>: IC3_2.15(A2)
BEAM_TRIGGER_CFD*<3>: IC3_1.15(A2)
BEAM_TRIGGER_CFD<0>: IC3_4.2(A1)
BEAM_TRIGGER_CFD<1>: IC3_3.2(A1)
BEAM_TRIGGER_CFD<2>: IC3_2.2(A1)
BEAM_TRIGGER_CFD<3>: IC3_1.2(A1)
BUSY0: J3.6(A<5>) U2.4(IN)
BUSY0*: J3.3(A<2>) U2.5(IN)
BUSY1: J1.7(A<6>) U1.6(IN)
BUSY1*: J1.9(A<8>) U1.7(IN)
BUSY2: J2.7(A<6>) U3.6(IN)
BUSY2*: J2.9(A<8>) U3.7(IN)
CLK1: J1.3(A<2>) U1.2(IN)
CLK1*: J1.1(A<0>) U1.1(IN)
CLK2: J2.3(A<2>) U3.2(IN)
CLK2*: J2.1(A<0>) U3.1(IN)
CONT0: J3.5(A<4>) U2.7(IN)
CONT0*: J3.4(A<3>) U2.6(IN)
CONT1: J1.4(A<3>) U1.4(IN)
CONT1*: J1.6(A<5>) U1.5(IN)
CONT2: J2.4(A<3>) U3.4(IN)
CONT2*: J2.6(A<5>) U3.5(IN)
DP0_C2M: J4.C2(C<2>)
DP0_C2M*: J4.C3(C<3>)
DP0_M2C: J4.C6(C<6>)
DP0_M2C*: J4.C7(C<7>)
DUT_CLK0: J3.2(A<1>) U2.9(IN)
DUT_CLK0*: J3.1(A<0>) U2.10(IN)
FMC_CLK1_M2C: J4.G2(G<2>)
FMC_CLK1_M2C*: J4.G3(G<3>)
FMC_LA*<0>: J4.G7(G<7>)
FMC_LA*<1>: J4.D9(D<9>)
FMC_LA*<2>: J4.H8(H<8>)
FMC_LA*<3>: J4.G10(G<10>)
FMC_LA*<4>: J4.H11(H<11>)
FMC_LA*<5>: J4.D12(D<12>)
FMC_LA*<6>: J4.C11(C<11>)
FMC_LA*<7>: J4.H14(H<14>)
FMC_LA*<8>: J4.G13(G<13>)
FMC_LA*<9>: J4.D15(D<15>)
FMC_LA*<10>: J4.C15(C<15>)
FMC_LA*<11>: J4.H17(H<17>)
FMC_LA*<12>: J4.G16(G<16>)
FMC_LA*<13>: J4.D18(D<18>)
FMC_LA*<14>: J4.C19(C<19>)
FMC_LA*<15>: J4.H20(H<20>)
FMC_LA*<16>: J4.G19(G<19>)
FMC_LA*<17>: J4.D21(D<21>)
FMC_LA*<18>: J4.C23(C<23>)
FMC_LA*<19>: J4.H23(H<23>)
FMC_LA*<20>: J4.G22(G<22>)
FMC_LA*<21>: J4.H26(H<26>)
FMC_LA*<22>: J4.G25(G<25>)
FMC_LA*<23>: J4.D24(D<24>)
FMC_LA*<24>: J4.H29(H<29>)
FMC_LA*<25>: J4.G28(G<28>)
FMC_LA*<26>: J4.D27(D<27>)
FMC_LA*<27>: J4.C27(C<27>)
FMC_LA*<28>: J4.H32(H<32>)
FMC_LA*<29>: J4.G31(G<31>)
FMC_LA*<30>: J4.H35(H<35>)
FMC_LA*<31>: J4.G34(G<34>)
FMC_LA*<32>: J4.H38(H<38>)
FMC_LA*<33>: J4.G37(G<37>)
FMC_LA<0>: J4.G6(G<6>)
FMC_LA<1>: J4.D8(D<8>)
FMC_LA<2>: J4.H7(H<7>)
FMC_LA<3>: J4.G9(G<9>)
FMC_LA<4>: J4.H10(H<10>)
FMC_LA<5>: J4.D11(D<11>)
FMC_LA<6>: J4.C10(C<10>)
FMC_LA<7>: J4.H13(H<13>)
FMC_LA<8>: J4.G12(G<12>)
FMC_LA<9>: J4.D14(D<14>)
FMC_LA<10>: J4.C14(C<14>)
FMC_LA<11>: J4.H16(H<16>)
FMC_LA<12>: J4.G15(G<15>)
FMC_LA<13>: J4.D17(D<17>)
FMC_LA<14>: J4.C18(C<18>)
FMC_LA<15>: J4.H19(H<19>)
FMC_LA<16>: J4.G18(G<18>)
FMC_LA<17>: J4.D20(D<20>)
FMC_LA<18>: J4.C22(C<22>)
FMC_LA<19>: J4.H22(H<22>)
FMC_LA<20>: J4.G21(G<21>)
FMC_LA<21>: J4.H25(H<25>)
FMC_LA<22>: J4.G24(G<24>)
FMC_LA<23>: J4.D23(D<23>)
FMC_LA<24>: J4.H28(H<28>)
FMC_LA<25>: J4.G27(G<27>)
FMC_LA<26>: J4.D26(D<26>)
FMC_LA<27>: J4.C26(C<26>)
FMC_LA<28>: J4.H31(H<31>)
FMC_LA<29>: J4.G30(G<30>)
FMC_LA<30>: J4.H34(H<34>)
FMC_LA<31>: J4.G33(G<33>)
FMC_LA<32>: J4.H37(H<37>)
FMC_LA<33>: J4.G36(G<36>)
FMC_PRSNT_M2C_L: J4.H2(H<2>)
FMC_PWR_GOOD_FLASH_RST_B: J4.D1(D<1>)
FMC_TCK_BUF: J4.D29(D<29>)
FMC_TDO: J4.D31(D<31>)
FMC_TMS_BUF: J4.D33(D<33>)
FPGA_TDO: J4.D30(D<30>)
FRAME: J3.9 J3.10
GA0: J4.C34(C<34>)
GA1: J4.D35(D<35>)
GBTCLK0_M2C: J4.D4(D<4>)
GBTCLK0_M2C*: J4.D5(D<5>)
HDMI_POWER_ENABLE1: IC4.2(A)
HDMI_POWER_ENABLE2: IC6.2(A)
IN<0>: PX5.1(A) R2_4.1(A<0>)
IN<1>: PX4.1(A) R2_3.1(A<0>)
IN<2>: PX3.1(A) R2_2.1(A<0>)
IN<3>: PX2.1(A) R2_1.1(A<0>)
M5V: C1_1.1(A<0>) C1_2.1(A<0>) C1_3.1(A<0>) C1_4.1(A<0>) C6_1.2(B<0>) C6_2.2(B<0>) C6_3.2(B<0>) C6_4.2(B<0>) C9_1.2(B<0>) C9_2.2(B<0>) C9_3.2(B<0>) C9_4.2(B<0>) D1_1.1(A) D1_2.1(A) D1_3.1(A) D1_4.1(A) IC2.11(V-) IC2_1.6(VEE<0>) IC2_1.15(VEE<1>) IC2_2.6(VEE<0>) IC2_2.15(VEE<1>) IC2_3.6(VEE<0>) IC2_3.15(VEE<1>) IC2_4.6(VEE<0>) IC2_4.15(VEE<1>)
SCL: IC1.14(SCL) IC7.6(SCL) J4.C30(C<30>)
SDA: IC1.13(SDA) IC7.5(SDA) J4.C31(C<31>)
SPARE1: J1.10(A<9>) TP11.1(A<0>) U1.9(IN)
SPARE1*: J1.12(A<11>) TP12.1(A<0>) U1.10(IN)
SPARE2: J2.10(A<9>) U3.9(IN)
SPARE2*: J2.12(A<11>) U3.10(IN)
TRIG0: J3.8(A<7>) U2.1(IN)
TRIG0*: J3.7(A<6>) U2.2(IN)
TRIG1: IC3.1(I/O11) IC3.3(I/O12) J1.15(A<14>)
TRIG1*: IC3.4(I/O22) IC3.6(I/O21) J1.16(A<15>)
TRIG2: IC5.1(I/O11) IC5.3(I/O12) J2.15(A<14>)
TRIG2*: IC5.4(I/O22) IC5.6(I/O21) J2.16(A<15>)
TRST_L: J4.D34(D<34>)
UNNAMED_1_24AA025E48_I8_A0: IC7.1(A0)
UNNAMED_1_24AA025E48_I8_A1: IC7.2(A1)
UNNAMED_1_24AA025E48_I8_A2: IC7.3(A2)
UNNAMED_1_AD5665R_I63_VOUTA: IC1.4(VOUTA) IC2.3(PIN<0>)
UNNAMED_1_AD5665R_I63_VOUTB: IC1.11(VOUTB) IC2.12(PIN<0>)
UNNAMED_1_AD5665R_I63_VOUTC: IC1.5(VOUTC) IC2.5(PIN<0>)
UNNAMED_1_AD5665R_I63_VOUTD: IC1.10(VOUTD) IC2.10(PIN<0>)
UNNAMED_1_CAPCERSMDCL1_I12_B_5: C6_5.2(B<0>) IC1_5.1(FB1*) R5_5.2(B<0>) R6_5.2(B<0>)
UNNAMED_1_CAPCERSMDCL1_I13_B_5: C9_5.2(B<0>) IC1_5.4(FB2) R3_5.1(A<0>) R4_5.2(B<0>)
UNNAMED_1_CAPCERSMDCL2_I9_B_5: C2_5.2(B<0>) IC1_5.9(SHDN/SS1*) R2_5.2(B<0>)
UNNAMED_1_CAPCERSMDCL2_I10_B_5: C3_5.2(B<0>) IC1_5.7(SHDN/SS2*) R1_5.2(B<0>)
UNNAMED_1_CAPCERSMDCL2_I11_A_5: C5_5.1(A<0>) IC1_5.6(SW2) L2_5.2(B<0>)
UNNAMED_1_CAPCERSMDCL2_I11_B_5: C5_5.2(B<0>) D2_5.A(A<0>) L3_5.1(A<0>)
UNNAMED_1_CAPCERSMDCL2_I15_B_5: C6_5.1(A<0>) C8_5.2(B<0>) D1_5.C(K<0>) L4_5.1(A) R5_5.1(A<0>)
UNNAMED_1_CAPCERSMDCL2_I17_B_5: C4_5.2(B<0>) IC1_5.2(FB1) IC1_5.3(VREF) R3_5.2(B<0>)
UNNAMED_1_CAPCERSMDCL2_I20_B_5: C7_5.2(B<0>) C9_5.1(A<0>) L3_5.2(B<0>) L5_5.1(A) R4_5.1(A<0>)
UNNAMED_1_CAPCERSMDCL2_I78_B_1: C2_1.2(B<0>) IC2_1.11(IN+<0>) R5_1.2(B<0>) TP1_1.1(A<0>)
UNNAMED_1_CAPCERSMDCL2_I78_B_2: C2_2.2(B<0>) IC2_2.11(IN+<0>) R5_2.2(B<0>) TP1_2.1(A<0>)
UNNAMED_1_CAPCERSMDCL2_I78_B_3: C2_3.2(B<0>) IC2_3.11(IN+<0>) R5_3.2(B<0>) TP1_3.1(A<0>)
UNNAMED_1_CAPCERSMDCL2_I78_B_4: C2_4.2(B<0>) IC2_4.11(IN+<0>) R5_4.2(B<0>) TP1_4.1(A<0>)
UNNAMED_1_DELAYLINEGL2L_I14_1_1: IC1_1.15(A2) R1_1.2(B<0>)
UNNAMED_1_DELAYLINEGL2L_I14_1_2: IC1_2.15(A2) R1_2.2(B<0>)
UNNAMED_1_DELAYLINEGL2L_I14_1_3: IC1_3.15(A2) R1_3.2(B<0>)
UNNAMED_1_DELAYLINEGL2L_I14_1_4: IC1_4.15(A2) R1_4.2(B<0>)
UNNAMED_1_DELAYLINEGL2L_I14_2_1: IC1_1.10(B2) R4_1.2(B<0>)
UNNAMED_1_DELAYLINEGL2L_I14_2_2: IC1_2.10(B2) R4_2.2(B<0>)
UNNAMED_1_DELAYLINEGL2L_I14_2_3: IC1_3.10(B2) R4_3.2(B<0>)
UNNAMED_1_DELAYLINEGL2L_I14_2_4: IC1_4.10(B2) R4_4.2(B<0>)
UNNAMED_1_DELAYLINEGL2L_I140__1: D1_1.3(AC) IC1_1.2(A1) IC2_1.12(IN-<0>) R2_1.2(B<0>) R3_1.1(A<0>)
UNNAMED_1_DELAYLINEGL2L_I140__2: D1_2.3(AC) IC1_2.2(A1) IC2_2.12(IN-<0>) R2_2.2(B<0>) R3_2.1(A<0>)
UNNAMED_1_DELAYLINEGL2L_I140__3: D1_3.3(AC) IC1_3.2(A1) IC2_3.12(IN-<0>) R2_3.2(B<0>) R3_3.1(A<0>)
UNNAMED_1_DELAYLINEGL2L_I140__4: D1_4.3(AC) IC1_4.2(A1) IC2_4.12(IN-<0>) R2_4.2(B<0>) R3_4.1(A<0>)
UNNAMED_1_DIODE_I48_A_5: D1_5.A(A<0>) IC1_5.10(SW1) L1_5.2(B<0>)
UNNAMED_1_MAX9601_I1_HYS_1: IC2_1.8(HYS<0>) R10_1.2(B<0>)
UNNAMED_1_MAX9601_I1_HYS_2: IC2_2.8(HYS<0>) R10_2.2(B<0>)
UNNAMED_1_MAX9601_I1_HYS_3: IC2_3.8(HYS<0>) R10_3.2(B<0>)
UNNAMED_1_MAX9601_I1_HYS_4: IC2_4.8(HYS<0>) R10_4.2(B<0>)
UNNAMED_1_MAX9601_I1_IN_1: IC2_1.10(IN+<0>) R3_1.2(B<0>) R7_1.2(B<0>)
UNNAMED_1_MAX9601_I1_IN_1_1: IC1_1.7(B1) IC2_1.9(IN-<0>) R6_1.2(B<0>) R8_1.2(B<0>)
UNNAMED_1_MAX9601_I1_IN_1_2: IC1_2.7(B1) IC2_2.9(IN-<0>) R6_2.2(B<0>) R8_2.2(B<0>)
UNNAMED_1_MAX9601_I1_IN_1_3: IC1_3.7(B1) IC2_3.9(IN-<0>) R6_3.2(B<0>) R8_3.2(B<0>)
UNNAMED_1_MAX9601_I1_IN_1_4: IC1_4.7(B1) IC2_4.9(IN-<0>) R6_4.2(B<0>) R8_4.2(B<0>)
UNNAMED_1_MAX9601_I1_IN_2: IC2_2.10(IN+<0>) R3_2.2(B<0>) R7_2.2(B<0>)
UNNAMED_1_MAX9601_I1_IN_3: IC2_3.10(IN+<0>) R3_3.2(B<0>) R7_3.2(B<0>)
UNNAMED_1_MAX9601_I1_IN_4: IC2_4.10(IN+<0>) R3_4.2(B<0>) R7_4.2(B<0>)
UNNAMED_1_MAX9601_I1_Q_1: IC2_1.2(Q*<0>) IC3_1.10(B2) R12_1.2(B<0>) TP6_1.1(A<0>)
UNNAMED_1_MAX9601_I1_Q_1_1: IC2_1.1(Q<0>) IC3_1.7(B1) R14_1.2(B<0>) TP5_1.1(A<0>)
UNNAMED_1_MAX9601_I1_Q_1_2: IC2_2.1(Q<0>) IC3_2.7(B1) R14_2.2(B<0>) TP5_2.1(A<0>)
UNNAMED_1_MAX9601_I1_Q_1_3: IC2_3.1(Q<0>) IC3_3.7(B1) R14_3.2(B<0>) TP5_3.1(A<0>)
UNNAMED_1_MAX9601_I1_Q_1_4: IC2_4.1(Q<0>) IC3_4.7(B1) R14_4.2(B<0>) TP5_4.1(A<0>)
UNNAMED_1_MAX9601_I1_Q_2: IC2_2.2(Q*<0>) IC3_2.10(B2) R12_2.2(B<0>) TP6_2.1(A<0>)
UNNAMED_1_MAX9601_I1_Q_3: IC2_3.2(Q*<0>) IC3_3.10(B2) R12_3.2(B<0>) TP6_3.1(A<0>)
UNNAMED_1_MAX9601_I1_Q_4: IC2_4.2(Q*<0>) IC3_4.10(B2) R12_4.2(B<0>) TP6_4.1(A<0>)
UNNAMED_1_MAX9601_I71_HYS_1: IC2_1.13(HYS<0>) R9_1.2(B<0>)
UNNAMED_1_MAX9601_I71_HYS_2: IC2_2.13(HYS<0>) R9_2.2(B<0>)
UNNAMED_1_MAX9601_I71_HYS_3: IC2_3.13(HYS<0>) R9_3.2(B<0>)
UNNAMED_1_MAX9601_I71_HYS_4: IC2_4.13(HYS<0>) R9_4.2(B<0>)
UNNAMED_1_OPA4277_I22_MIN: IC2.2(MIN<0>)
UNNAMED_1_OPA4277_I22_MIN_1: IC2.9(MIN<0>)
UNNAMED_1_OPA4277_I22_MIN_2: IC2.6(MIN<0>)
UNNAMED_1_OPA4277_I22_MIN_3: IC2.13(MIN<0>)
UNNAMED_1_PC036AFMCLPCCONNECT_1: J4.H5(H<5>) PX1.2(B)
UNNAMED_1_PC036AFMCLPCCONNECTOR: J4.H4(H<4>) PX1.1(A)
UNNAMED_4_74LVC1G07_I28_Y: IC4.4(Y) T1.1(G)
UNNAMED_4_74LVC1G07_I40_Y: IC6.4(Y) T2.1(G)
UNNAMED_4_CON19P_I2_A: J1.14(A<13>) T1.2(S)
UNNAMED_4_CON19P_I3_A: J2.14(A<13>) T2.2(S)
VREF: IC1.7(VREFIN/VREFOUT)
VREF_A_M2C: J4.H1(H<1>)
VTHRESH<0>: IC2.1(OUT<0>) R5_4.1(A<0>)
VTHRESH<1>: IC2.14(OUT<0>) R5_3.1(A<0>)
VTHRESH<2>: IC2.7(OUT<0>) R5_2.1(A<0>)
VTHRESH<3>: IC2.8(OUT<0>) R5_1.1(A<0>)

Pads without a net: IC4 1; IC6 1; IC7 7; J1 13 18 19; J2 13 18 19

## Via types
v1: diameter 0.61, hole 0.3, TOP to BOTTOM, 42 vias
v2: diameter 0.914, hole 0.406, TOP to BOTTOM, 204 vias
v3: diameter 0.61, hole 0.33, TOP to BOTTOM, 8 vias
v4: diameter 0.6, hole 0.3, TOP to BOTTOM, 16 vias

## Routing (per net, layer and track width the routed paths; a pad name or vN(x,y) marks a point on that pad's centre or on a via; arc(x,y) is an arc through that point)
GND_SIGNAL: length 346.9
  TOP w0.17: v4(26.5,65.4) U3.3 v4(28.32,65.4) ; 12.28,17.33 C1_5.1 ; C1_5.1 12.28,19.09 ; C1_5.1 13.06,18.21 ; C1_5.1 11.5,18.21 ; v4(11.24,65.36) U1.3 v4(9.4,65.36) ; D2_5.C 26,13.08 ; D2_5.C 26,12.02 ; D2_5.C 25.32,12.55 ; D2_5.C 26.68,12.55 ; 27.85,14.13 C7_5.1 ; C7_5.1 27.85,15.89 ; C7_5.1 27.07,15.01 ; C7_5.1 28.63,15.01 ; IC3.2 v4(18.44,65.2) ; C14_5.1 13.06,2.24 ; C14_5.1 12.28,1.36 ; C14_5.1 12.28,3.12 ; C14_5.1 11.5,2.24 ; C8_5.1 27.83,4.3 ; C8_5.1 27.83,2.54 ; C8_5.1 28.61,3.42 ; C8_5.1 27.05,3.42 ; IC5.2 v4(35.4,65.18) ; v4(47.62,55.29) 47.67,55.29 47.68,55.3 U2.3 49.35,55.3 49.36,55.31 v4(49.48,55.31)
  TOP w0.2: 21.68,11.72 21.5,11.72 21.36,11.86 21.01,11.86
  TOP w0.226: IC1_5.5 20.83,11.82
  TOP w0.4: v2(70.3,37.9) 70.43,37.9 70.68,38.15 IC2_1.4 ; R4_2.1 91.31,54.45 IC1_2.11 91.3,52.9 v2(91.3,51.49) ; IC3_2.16 83.84,23.95 83.8,24 v2(83.59,24) ; IC1_1.6 72.31,46.7 72.3,46.7 v2(72.3,46.71) ; v2(74.85,54.31) 74.85,54.2 74.84,54.2 IC1_1.9 ; v2(72.3,51.49) 72.3,52.9 IC1_1.11 72.31,54.45 R4_1.1 ; v2(74.85,46.71) 74.85,46.6 74.84,46.59 IC1_1.8 ; IC1_4.13 126.77,54.09 126.55,54.3 v2(126.55,54.31) ; IC3_4.1 131.75,23.95 131.8,24 v2(132.01,24) ; v2(90.05,46.71) 90.05,46.6 90.03,46.59 IC1_2.5 ; IC1_3.8 112.84,46.59 112.85,46.6 v2(112.85,46.71) ; v2(88.55,54.31) 88.55,54.3 88.77,54.09 IC1_2.13 ; v2(106.5,46.71) 106.5,46.6 106.5,46.59 IC1_3.3 ; v2(129.3,51.49) 129.3,52.9 IC1_4.11 129.31,54.45 R4_4.1 ; v2(124.41,32.8) 124.15,32.8 124.11,32.84 IC3_4.9 ; v2(106.4,51.49) 106.4,51.5 106.5,51.59 IC1_3.14 106.5,54.45 R1_3.1 ; R1_2.1 87.5,54.45 IC1_2.14 87.5,51.59 87.4,51.5 v2(87.4,51.49) ; IC3_3.3 v2(113.01,26.49) ; IC1_3.12 109.03,54.13 109.2,54.3 v2(109.2,54.31) ; IC1_4.6 129.31,46.7 129.3,46.7 v2(129.3,46.71) ; C2_3.1 v2(99.36,42.6) ; IC3_3.8 v2(110.19,32.84) ; IC1_1.1 v2(65.95,46.71) ; R7_2.1 91.65,43.5 91.95,43.8 v2(92.03,43.8) ; v2(93.85,54.31) 93.85,54.2 93.84,54.2 IC1_2.9 ; v3(124.39,29.03) IC3_4.12 v2(121.48,29.03) 121.48,29.91 R12_4.1 ; C4_2.1 v2(93.8,33.8) ; v3(105.39,29.03) IC3_3.12 v2(102.48,29.03) 102.48,29.91 R12_3.1 ; v2(93.85,46.71) 93.85,46.6 93.84,46.59 IC1_2.8 ; IC1_2.12 90.03,54.13 90.2,54.3 v2(90.2,54.31) ; R7_1.1 72.65,43.5 72.95,43.8 v2(73.03,43.8) ; IC1_4.1 v2(122.95,46.71) ; R8_4.1 v2(134.5,39.5) ; IC1_4.5 128.03,46.59 128.05,46.6 v2(128.05,46.71) ; IC3_1.16 64.84,23.95 64.8,24 v2(64.59,24) ; IC1_2.4 v2(88.77,46.71) ; IC3_2.5 93.69,29.03 93.75,29.1 v2(94.01,29.1) 94.01,29.86 R14_2.1 ; v2(109.05,46.71) 109.05,46.6 109.03,46.59 IC1_3.5 ; IC3_4.4 v2(129.19,27.77) ; v2(102.59,24) 102.8,24 102.84,23.95 IC3_3.16 ; v2(111.03,43.8) 110.95,43.8 110.65,43.5 R7_3.1 ; C8_3.1 v2(99.36,37.8) ; IC3_1.5 74.69,29.03 74.75,29.1 v2(75.01,29.1) 75.01,29.86 R14_1.1 ; IC1_4.8 131.84,46.59 131.85,46.6 v2(131.85,46.71) ; IC1_4.4 v2(126.77,46.71) ; v2(89.3,37.9) 89.43,37.9 89.68,38.15 IC2_2.4 ; R10_2.1 96.75,36.06 96.8,36.01 v2(96.8,35.1) ; IC1_4.3 125.5,46.59 125.5,46.6 v2(125.5,46.71) ; v3(67.39,29.03) IC3_1.12 v2(64.48,29.03) 64.48,29.91 R12_1.1 ; IC3_3.9 105.11,32.84 105.15,32.8 v2(105.41,32.8) ; IC1_3.4 v2(107.77,46.71) ; IC1_1.3 68.5,46.59 68.5,46.6 v2(68.5,46.71) ; IC3_3.13 v2(105.41,27.77) ; C6_2.1 v2(80.67,39.5) ; IC3_4.8 v2(129.19,32.84) ; v2(67.41,32.8) 67.15,32.8 67.11,32.84 IC3_1.9 ; C8_2.1 v2(80.36,37.8) ; IC3_4.5 131.69,29.03 131.75,29.1 v2(132.01,29.1) 132.01,29.86 R14_4.1 ; IC3_4.13 v2(124.41,27.77) ; IC2_3.4 108.68,38.15 108.43,37.9 v2(108.3,37.9) ; v2(87.5,46.71) 87.5,46.6 87.5,46.59 IC1_2.3 ; R11_4.1 v2(117.75,36.2) ; C3_1.1 v2(77.95,27.66) ; R1_4.1 125.5,54.45 IC1_4.14 125.5,51.59 125.4,51.5 v2(125.4,51.49) ; IC1_2.16 v2(84.95,51.49) ; R8_3.1 v2(115.5,39.5) ; C4_4.1 v2(131.8,33.8) ; 73.6,30.3 v2(72.19,30.3) ; IC3_3.4 v2(110.19,27.77) ; C5_1.1 v2(76.15,36.1) ; IC1_1.5 71.03,46.59 71.05,46.6 v2(71.05,46.71) ; 62.5,34.6 v2(62.5,33.4) ; IC3_3.14 v2(102.59,26.49) ; IC3_4.16 121.84,23.95 121.8,24 v2(121.59,24) ; IC3_1.13 v2(67.41,27.77) ; R10_3.1 115.75,36.06 115.8,36.01 v2(115.8,35.1) ; IC3_1.8 v2(72.19,32.84) ; C3_2.1 v2(96.95,27.66) ; v2(128.2,54.31) 128.2,54.3 128.03,54.13 IC1_4.12 ; R1_1.1 68.5,54.45 IC1_1.14 68.5,51.59 68.4,51.5 v2(68.4,51.49) ; R9_1.1 v2(61.37,41) ; IC3_2.1 93.75,23.95 93.8,24 v2(94.01,24) ; IC1_1.4 v2(69.77,46.71) ; C3_4.1 v2(134.95,27.66) ; R11_3.1 v2(98.75,36.2) ; v2(69.55,54.31) 69.55,54.3 69.77,54.09 IC1_1.13 ; 66,30.3 v2(67.41,30.3) ; R8_1.1 v2(77.5,39.5) ; v2(71.2,54.31) 71.2,54.3 71.03,54.13 IC1_1.12 ; C6_3.1 v2(99.67,39.5) ; R11_1.1 v2(60.75,36.2) ; 123,30.3 v2(124.41,30.3) ; IC3_2.8 v2(91.19,32.84) ; C2_1.1 v2(61.37,42.6) ; C6_4.1 v2(118.67,39.5) ; R6_3.1 v2(115.65,41.4) ; 111.6,30.3 v2(110.19,30.3) ; IC2_4.17 v2(124.45,38.15) ; IC3_2.3 v2(94.01,26.49) ; C5_2.1 v2(95.15,36.1) ; IC2_2.17 v2(86.45,38.15) ; IC1_3.16 v2(103.95,51.49) ; R10_4.1 134.75,36.06 134.8,36.01 v2(134.8,35.1) ; IC3_2.14 v2(83.59,26.49) ; IC3_4.3 v2(132.01,26.49) ; v2(112.85,54.31) 112.85,54.2 112.84,54.2 IC1_3.9 ; C5_4.1 v2(133.15,36.1) ; 130.6,30.3 v2(129.19,30.3) ; IC3_4.14 v2(121.59,26.49) ; R14_3.1 113.01,29.86 v2(113.01,29.1) 112.75,29.1 112.69,29.03 IC3_3.5 ; v2(127.3,37.9) 127.43,37.9 127.68,38.15 IC2_4.4 ; R9_2.1 v2(80.36,41) ; R6_2.1 v2(96.65,41.4) ; C4_3.1 v2(112.8,33.8) ; IC1_4.9 131.84,54.2 131.85,54.2 v2(131.85,54.31) ; v2(91.3,46.71) 91.3,46.7 91.31,46.7 IC1_2.6 ; R12_2.1 83.48,29.91 v2(83.48,29.03) IC3_2.12 v3(86.39,29.03) ; R7_4.1 129.65,43.5 129.95,43.8 v2(130.03,43.8) ; R11_2.1 v2(79.75,36.2) ; C2_2.1 v2(80.36,42.6) ; v2(110.3,46.71) 110.3,46.7 110.31,46.7 IC1_3.6 ; R9_4.1 v2(118.36,41) ; IC2_1.17 v2(67.45,38.15) ; C6_1.1 v2(61.66,39.5) ; C2_4.1 v2(118.36,42.6) ; v2(107.55,54.31) 107.55,54.3 107.77,54.09 IC1_3.13 ; IC1_1.16 v2(65.95,51.49) ; IC3_1.1 74.75,23.95 74.8,24 v2(75.01,24) ; v2(110.3,51.49) 110.3,52.9 IC1_3.11 110.31,54.45 R4_3.1 ; IC3_2.4 v2(91.19,27.77) ; IC1_3.1 v2(103.95,46.71) ; IC3_3.1 112.75,23.95 112.8,24 v2(113.01,24) ; C8_4.1 v2(118.36,37.8) ; IC3_1.3 v2(75.01,26.49) ; v2(86.41,32.8) 86.15,32.8 86.11,32.84 IC3_2.9 ; 104,30.3 v2(105.41,30.3) ; 119.5,34.6 v2(119.5,33.4) ; IC3_1.4 v2(72.19,27.77) ; 81.5,34.6 v2(81.5,33.4) ; C8_1.1 v2(61.37,37.8) ; R6_1.1 v2(77.65,41.4) ; 85,30.3 v2(86.41,30.3) ; R8_2.1 v2(96.5,39.5) ; 92.6,30.3 v2(91.19,30.3) ; C4_1.1 v2(74.8,33.8) ; C3_3.1 v2(115.95,27.66) ; IC1_4.16 v2(122.95,51.49) ; IC3_1.14 v2(64.59,26.49) ; R9_3.1 v2(99.36,41) ; v2(77.8,35.1) 77.8,36.01 77.75,36.06 R10_1.1 ; C5_3.1 v2(114.15,36.1) ; IC1_2.1 v2(84.95,46.71) ; IC3_2.13 v2(86.41,27.77) ; IC2_3.17 v2(105.45,38.15) ; 100.5,34.6 v2(100.5,33.4) ; R6_4.1 v2(134.65,41.4)
  L2 w0.17: TP4_4.1 118.88,34.3 ; TP4_4.1 118,35.18 ; TP4_4.1 117.12,34.3 ; TP4_4.1 118,33.42 ; 61,33.42 TP4_1.1 ; TP4_1.1 61,35.18 ; TP4_1.1 61.88,34.3 ; TP4_1.1 60.12,34.3 ; TP7_4.1 126.75,29.88 ; TP7_4.1 126.75,28.12 ; TP7_4.1 125.87,29 ; TP7_4.1 127.63,29 ; TP7_1.1 69.75,29.88 ; TP7_1.1 69.75,28.12 ; TP7_1.1 68.87,29 ; TP7_1.1 70.63,29 ; TP7_3.1 107.75,29.88 ; TP7_3.1 106.87,29 ; TP7_3.1 108.63,29 ; TP7_3.1 107.75,28.12 ; 99,33.42 TP4_3.1 ; TP4_3.1 99.88,34.3 ; TP4_3.1 98.12,34.3 ; TP4_3.1 99,35.18 ; TP4_2.1 80.88,34.3 ; TP4_2.1 80,33.42 ; TP4_2.1 79.12,34.3 ; TP4_2.1 80,35.18 ; 88.75,28.12 TP7_2.1 ; TP7_2.1 87.87,29 ; TP7_2.1 88.75,29.88 ; TP7_2.1 89.63,29
  L5 w0.17: TP7_3.1 107.75,29.88 ; TP7_3.1 107.75,28.12 ; TP7_3.1 108.63,29 ; TP7_3.1 106.87,29 ; 98.12,34.3 TP4_3.1 ; TP4_3.1 99.88,34.3 ; TP4_3.1 99,33.42 ; TP4_3.1 99,35.18 ; 60.12,34.3 TP4_1.1 ; TP4_1.1 61,35.18 ; TP4_1.1 61.88,34.3 ; TP4_1.1 61,33.42 ; 69.75,28.12 TP7_1.1 ; TP7_1.1 70.63,29 ; TP7_1.1 68.87,29 ; TP7_1.1 69.75,29.88 ; TP4_2.1 80,35.18 ; TP4_2.1 80,33.42 ; TP4_2.1 80.88,34.3 ; TP4_2.1 79.12,34.3 ; TP7_2.1 89.63,29 ; TP7_2.1 87.87,29 ; TP7_2.1 88.75,29.88 ; TP7_2.1 88.75,28.12 ; 118,33.42 TP4_4.1 ; TP4_4.1 118.88,34.3 ; TP4_4.1 117.12,34.3 ; TP4_4.1 118,35.18 ; 126.75,28.12 TP7_4.1 ; TP7_4.1 125.87,29 ; TP7_4.1 127.63,29 ; TP7_4.1 126.75,29.88
  BOTTOM w0.17: v4(49.48,55.31) 50.06,54.73 C15.1 ; v4(11.24,65.36) 11.69,64.91 11.69,64.29 C14.1 ; C16.1 28.32,64.73 v4(28.32,65.4)
  BOTTOM w0.4: C9_3.1 108.9,37.25 108.3,37.85 v2(108.3,37.9) ; v2(122.6,43.2) 122.78,43.2 123.15,42.83 C10_4.1 ; C10_2.1 85.15,42.83 84.78,43.2 v2(84.6,43.2) ; v2(70.3,37.9) 70.3,37.85 70.9,37.25 C9_1.1 ; C7_2.1 91.64,42.05 v2(92.27,42.68) ; v2(73.27,42.68) 72.64,42.05 C7_1.1 ; v2(130.27,42.68) 129.64,42.05 C7_4.1 ; v2(127.3,37.9) 127.3,37.85 127.9,37.25 C9_4.1 ; v2(103.6,43.2) 103.78,43.2 104.15,42.83 C10_3.1 ; C9_2.1 89.9,37.25 89.3,37.85 v2(89.3,37.9) ; v2(111.27,42.68) 110.64,42.05 C7_3.1 ; v2(65.6,43.2) 65.78,43.2 66.15,42.83 C10_1.1
  BOTTOM w0.5: R6_5.1 v1(22.08,6.53) ; C3_5.1 v1(16.04,15.56) ; C2_5.1 v1(16.06,4.82) ; C4_5.1 v1(27.02,9.46)
  vias: v1(10.18,10.18) v1(12.28,19.98) v1(12.27,16.48) v1(12.27,4) v1(13.93,18.21) v1(13.93,2.24) v1(16.62,19.52) v1(16.62,1.69) v1(18.33,14.23) v1(19.07,11.74) v1(19.07,8.25) v1(19.83,11.75) v1(19.82,8.26) v1(20.41,1.69) v1(20.74,19.54) v1(20.67,12.55) v1(23.71,19.56) v1(23.71,1.69) v1(24.62,13.71) v1(26.5,16.63) v1(26.51,1.67) v1(26.58,5.6) v1(27.62,12.54) v1(28.07,9.44) v1(28.58,19.56) v1(28.59,12.54) v1(28.58,1.69)
P2V5: length 68.4
  TOP w0.17: v4(13.69,65.37) 13.71,65.36 U1.8 v4(15.41,65.36) ; v4(32.6,65.4) U3.8 v4(30.76,65.4) ; v4(51.92,55.33) 52,55.33 52.03,55.3 U2.8 v4(53.78,55.3) ; IC5.5 v4(38.12,65.18) ; IC3.5 v4(21.2,65.2)
  TOP w0.2: 82.95,37.85 83.4,38.3 83.65,38.3 84.15,38.8 IC2_2.16 ; v2(130.4,37.4) 130.15,37.65 130.15,38.36 129.71,38.8 IC2_4.5 ; IC2_1.5 72.71,38.8 73.15,38.36 73.15,37.65 v2(73.4,37.4) ; v2(92.4,37.4) 92.15,37.65 92.15,38.36 91.71,38.8 IC2_2.5 ; 63.95,37.85 64.4,38.3 64.65,38.3 65.15,38.8 IC2_1.16 ; IC2_4.16 122.15,38.8 121.65,38.3 121.4,38.3 120.95,37.85 ; IC2_3.5 110.71,38.8 111.15,38.36 111.15,37.65 v2(111.4,37.4) ; IC2_3.16 103.15,38.8 102.65,38.3 102.4,38.3 101.95,37.85
  TOP w0.4: v2(86.6,36.9) 86.52,36.9 86.15,37.27 86.14,37.27 86,37.41 85.95,37.41 85.86,37.5 IC2_2.18 83.25,37.5 C8_2.2 82.95,37.85 ; C5_1.2 v2(73.4,37.4) 73.12,37.4 73.02,37.5 IC2_1.3 ; v2(124.6,36.9) 124.52,36.9 124.15,37.27 124.14,37.27 124,37.41 123.95,37.41 123.86,37.5 IC2_4.18 121.25,37.5 C8_4.2 120.95,37.85 ; C5_4.2 v2(130.4,37.4) 130.12,37.4 130.02,37.5 IC2_4.3 ; v2(96.95,31.34) C3_2.2 ; C5_2.2 v2(92.4,37.4) 92.12,37.4 92.02,37.5 IC2_2.3 ; v2(77.95,31.34) C3_1.2 ; v2(134.95,31.34) C3_4.2 ; v2(105.6,36.9) 105.52,36.9 105.15,37.27 105.14,37.27 105,37.41 104.95,37.41 104.86,37.5 IC2_3.18 102.25,37.5 C8_3.2 101.95,37.85 ; 63.95,37.85 C8_1.2 64.25,37.5 IC2_1.18 66.86,37.5 66.95,37.41 67,37.41 67.14,37.27 67.15,37.27 67.52,36.9 v2(67.6,36.9) ; v2(115.95,31.34) C3_3.2 ; IC2_3.3 111.02,37.5 111.12,37.4 v2(111.4,37.4) C5_3.2
  BOTTOM w0.17: C14.2 13.14,64.3 13.14,65.11 13.4,65.37 v4(13.69,65.37) ; C15.2 51.56,54.96 v4(51.92,55.33) ; C16.2 30.76,64.89 v4(30.76,65.4)
  BOTTOM w0.4: 111.6,29.1 v3(110.2,29.1) ; 92.6,29.1 v3(91.2,29.1) ; 130.6,29.1 v3(129.2,29.1) ; 73.6,29.1 v3(72.2,29.1)
P3V3: length 24.7
  TOP w0.226: 16.91,10.18 16.93,10.2 IC1_5.8 ; 11.99,10.2 11.99,10.19
  TOP w0.5: C1_5.2 v1(10.48,16.28) 10.48,15.45 10.81,15.12 L2_5.1 ; C14_5.2 v1(10.48,4.15) 10.48,5.12 10.81,5.45 L1_5.1
  TOP w0.6: 11.99,10.19 10.81,9.01 L1_5.1 ; L2_5.1 10.81,11.38 11.99,10.2 v1(13.65,10.2) 15.68,10.2 15.71,10.18 16.91,10.18
  BOTTOM w0.5: R2_5.1 v1(13.65,10.2) 13.66,10.21 R1_5.1
P5V: length 42.1
  TOP w0.4: C4_4.2 v2(135.35,33.8) ; IC2_1.7 70.68,40.1 v2(70.4,40.38) ; v2(127.4,40.38) 127.68,40.1 IC2_4.7 ; v2(108.85,57.9) 108.8,57.95 C1_3.2 107.4,58.15 D1_3.2 ; v2(105.55,40.47) 105.34,40.26 105.24,40.26 105.08,40.1 IC2_3.14 ; D1_2.2 88.4,58.15 C1_2.2 89.8,57.95 v2(89.85,57.9) ; IC2_2.7 89.68,40.1 v2(89.4,40.38) ; v2(124.55,40.47) 124.34,40.26 124.24,40.26 124.08,40.1 IC2_4.14 ; IC2_2.14 86.08,40.1 86.24,40.26 86.34,40.26 v2(86.55,40.47) ; IC2_1.14 67.08,40.1 67.24,40.26 67.34,40.26 v2(67.55,40.47) ; v2(108.4,40.38) 108.68,40.1 IC2_3.7 ; D1_4.2 126.4,58.15 C1_4.2 127.8,57.95 v2(127.85,57.9) ; C4_2.2 v2(97.35,33.8) ; v2(70.85,57.9) 70.8,57.95 C1_1.2 69.4,58.15 D1_1.2 ; C4_1.2 v2(78.35,33.8) ; C4_3.2 v2(116.35,33.8)
  BOTTOM w0.4: v2(89.4,40.38) 89.63,40.38 90.05,40.8 90.55,40.8 C7_2.2 ; v2(105.55,40.47) 104.23,40.47 C10_3.2 ; C10_2.2 85.23,40.47 v2(86.55,40.47) ; v2(108.4,40.38) 108.63,40.38 109.05,40.8 109.55,40.8 C7_3.2 ; C7_1.2 71.55,40.8 71.05,40.8 70.63,40.38 v2(70.4,40.38) ; v2(127.4,40.38) 127.63,40.38 128.05,40.8 128.55,40.8 C7_4.2 ; C10_1.2 66.23,40.47 v2(67.55,40.47) ; v2(124.55,40.47) 123.23,40.47 C10_4.2
BEAM_TRIGGER*<0>: length 9.3
  TOP w0.2: R11_4.2 120.25,35.03 120.27,35.01 120.27,33.81 120.33,33.75 120.33,33.05
  TOP w0.4: IC2_4.19 121.7,36.85 121.05,36.2 R11_4.2 ; 120.33,33.05 120.33,32.94 118.7,31.3 TP3_4.1 118.7,30.55
BEAM_TRIGGER*<1>: length 9.3
  TOP w0.2: 101.33,33.05 101.33,33.75 101.27,33.81 101.27,35.01 101.25,35.03 R11_3.2
  TOP w0.4: 101.33,33.05 101.33,32.94 99.7,31.3 TP3_3.1 99.7,30.55 ; IC2_3.19 102.7,36.85 102.05,36.2 R11_3.2
BEAM_TRIGGER*<2>: length 9.3
  TOP w0.2: R11_2.2 82.25,35.03 82.27,35.01 82.27,33.81 82.33,33.75 82.33,33.05
  TOP w0.4: IC2_2.19 83.7,36.85 83.05,36.2 R11_2.2 ; 82.33,33.05 82.33,32.94 80.7,31.3 TP3_2.1 80.7,30.55
BEAM_TRIGGER*<3>: length 9.3
  TOP w0.2: R11_1.2 63.25,35.03 63.27,35.01 63.27,33.81 63.34,33.75 63.34,33.05
  TOP w0.4: 63.34,33.05 63.34,32.94 61.7,31.3 TP3_1.1 61.7,30.55 ; R11_1.2 64.05,36.2 64.7,36.85 IC2_1.19
BEAM_TRIGGER<0>: length 7.7
  TOP w0.2: IC2_4.20 122.5,35.74 TP2_4.1 122.4,34.4 R13_4.2 121.05,32.8 120.15,31.9
  TOP w0.4: 120.15,31.9 120.15,30.5
BEAM_TRIGGER<1>: length 7.7
  TOP w0.2: 101.15,31.9 102.05,32.8 R13_3.2 103.4,34.4 TP2_3.1 103.5,35.74 IC2_3.20
  TOP w0.4: 101.15,31.9 101.15,30.5
BEAM_TRIGGER<2>: length 7.7
  TOP w0.2: 82.15,31.9 83.05,32.8 R13_2.2 84.4,34.4 TP2_2.1 84.5,35.74 IC2_2.20
  TOP w0.4: 82.15,31.9 82.15,30.5
BEAM_TRIGGER<3>: length 7.7
  TOP w0.2: 63.15,31.9 64.05,32.8 R13_1.2 65.4,34.4 TP2_1.1 65.5,35.74 IC2_1.20
  TOP w0.4: 63.15,31.9 63.15,30.5
BEAM_TRIGGER_CFD*<0>: length 6.6
  TOP w0.4: IC3_4.15 125.53,25.23 126.15,24.6 126.15,21.45
BEAM_TRIGGER_CFD*<1>: length 6.6
  TOP w0.4: IC3_3.15 106.53,25.23 107.15,24.6 107.15,21.45
BEAM_TRIGGER_CFD*<2>: length 6.6
  TOP w0.4: 88.15,21.45 88.15,24.6 87.53,25.23 IC3_2.15
BEAM_TRIGGER_CFD*<3>: length 6.6
  TOP w0.4: 69.15,21.45 69.15,24.6 68.53,25.23 IC3_1.15
BEAM_TRIGGER_CFD<0>: length 7
  TOP w0.4: 126.95,21.5 126.95,24.6 127.58,25.23 IC3_4.2
BEAM_TRIGGER_CFD<1>: length 7
  TOP w0.4: IC3_3.2 108.58,25.23 107.95,24.6 107.95,21.5
BEAM_TRIGGER_CFD<2>: length 7
  TOP w0.4: IC3_2.2 89.58,25.23 88.95,24.6 88.95,21.5
BEAM_TRIGGER_CFD<3>: length 7
  TOP w0.4: IC3_1.2 70.58,25.23 69.95,24.6 69.95,21.5
BUSY0: length 9.2
  TOP w0.17: J3.6 50.02,59.55 50.02,55.08 49.7,54.77 49.3,54.77 49.26,54.8 U2.4
  TOP w0.25: U2.4 47.96,54.8 47.87,54.7
BUSY0*: length 12.8
  TOP w0.17: U2.5 49.82,54.3 50.38,54.86 50.38,59.79 49.51,60.66 49.51,61.8 50.76,63.05 51.44,63.05 J3.3
BUSY1: length 6.5
  TOP w0.17: J1.7 13.55,67.7 12.82,66.97 12.82,64.89 13.35,64.36 U1.6
BUSY1*: length 6.1
  TOP w0.17: U1.7 13.95,64.86 13.92,64.83 13.47,64.83 13.15,65.15 13.15,66.73 14.35,67.93 J1.9
BUSY2: length 6.5
  TOP w0.17: U3.6 30.51,64.4 29.85,65.06 29.85,67 30.55,67.7 J2.7
BUSY2*: length 6.1
  TOP w0.17: U3.7 31.03,64.9 30.99,64.86 30.52,64.86 30.21,65.16 30.21,65.38 30.2,65.4 30.2,66.79 31.35,67.93 J2.9
CLK1: length 4.4
  TOP w0.17: U1.2 10.96,65.86 11.1,66 11.1,67 11.95,67.85 J1.3
CLK1*: length 2.8
  TOP w0.17: J1.1 11.15,67.75 10.25,66.85 10.25,66.73
CLK2: length 4.3
  TOP w0.17: J2.3 28.95,67.85 28.35,67.25 28.35,66.25 28,65.9 U3.2
